# EAGLE board SparkFun_Thing_Plus_ESP32_WROOM_C-Panel (EAGLE 9.6.2), part 1 of 6
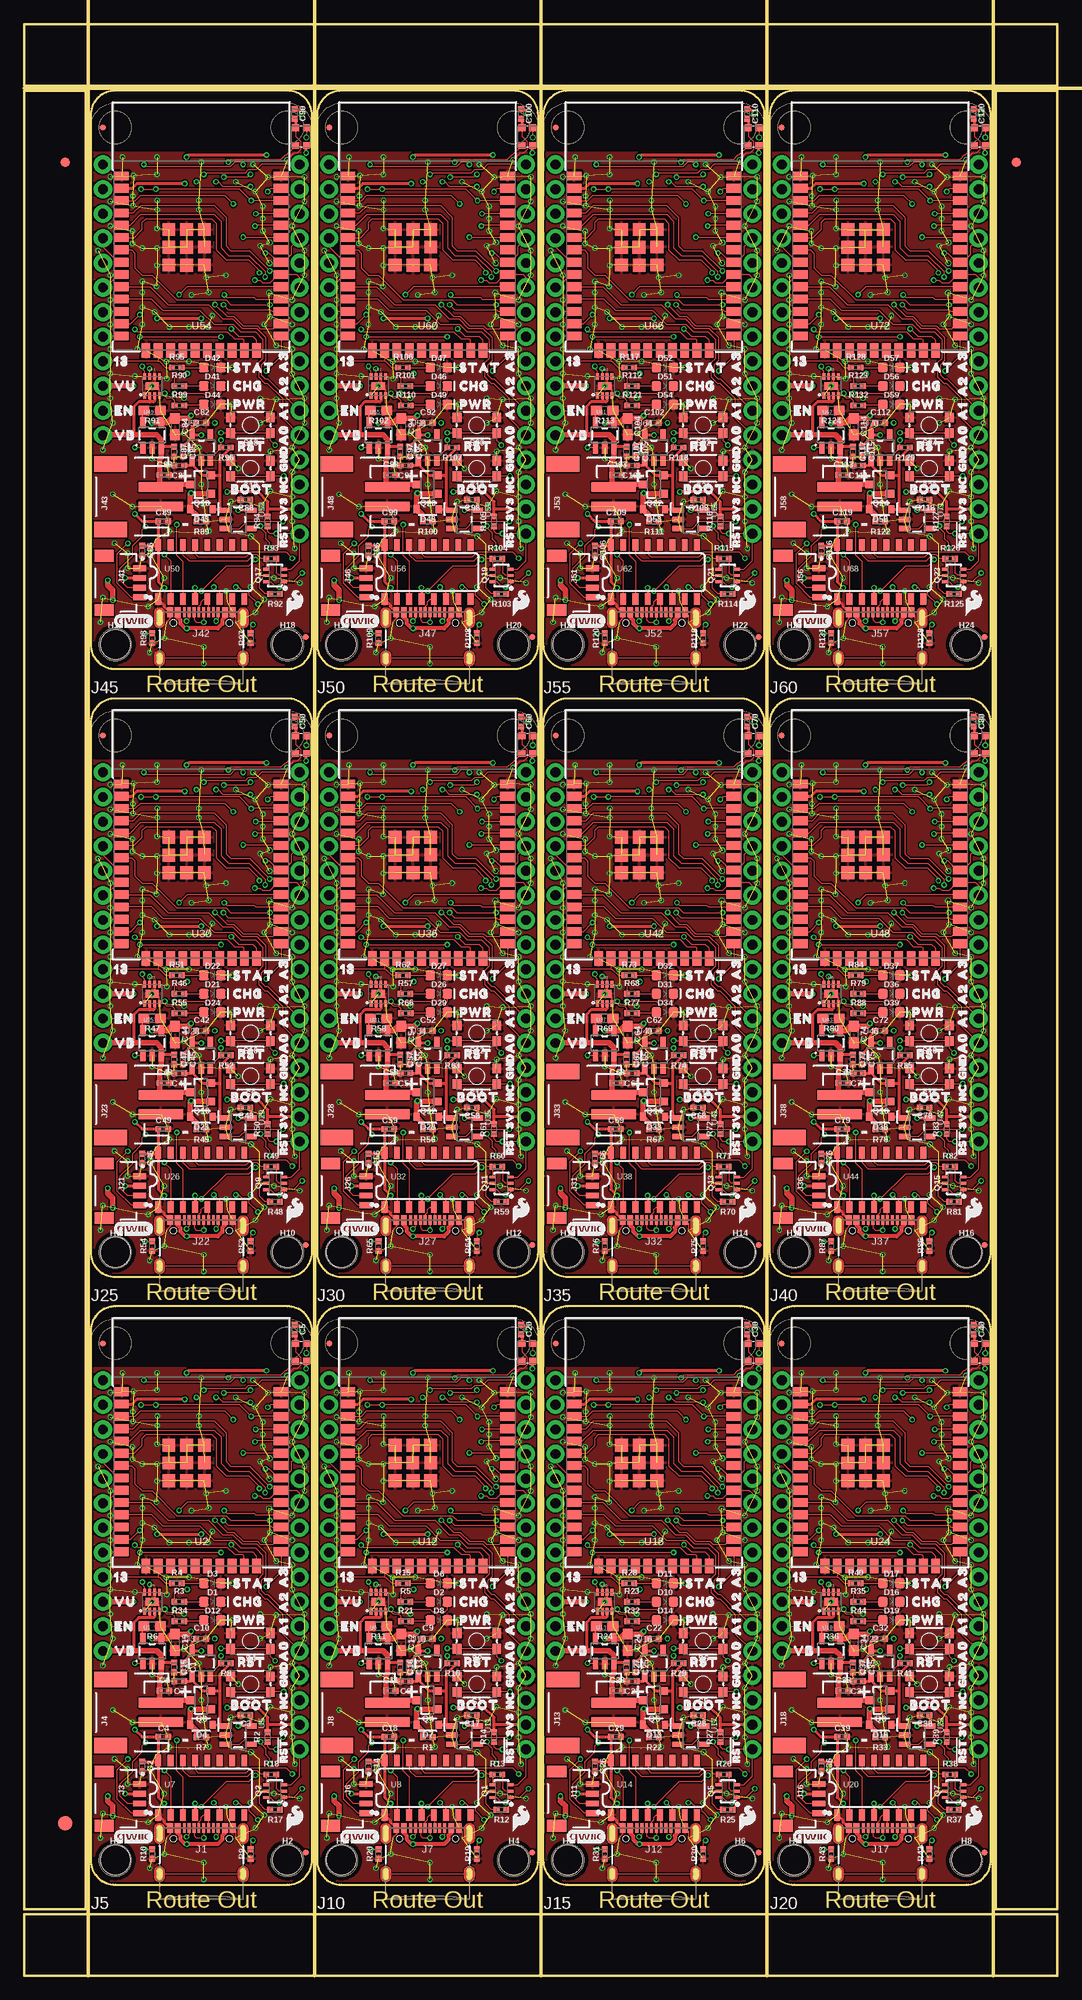
[diagram p0: board, top side]
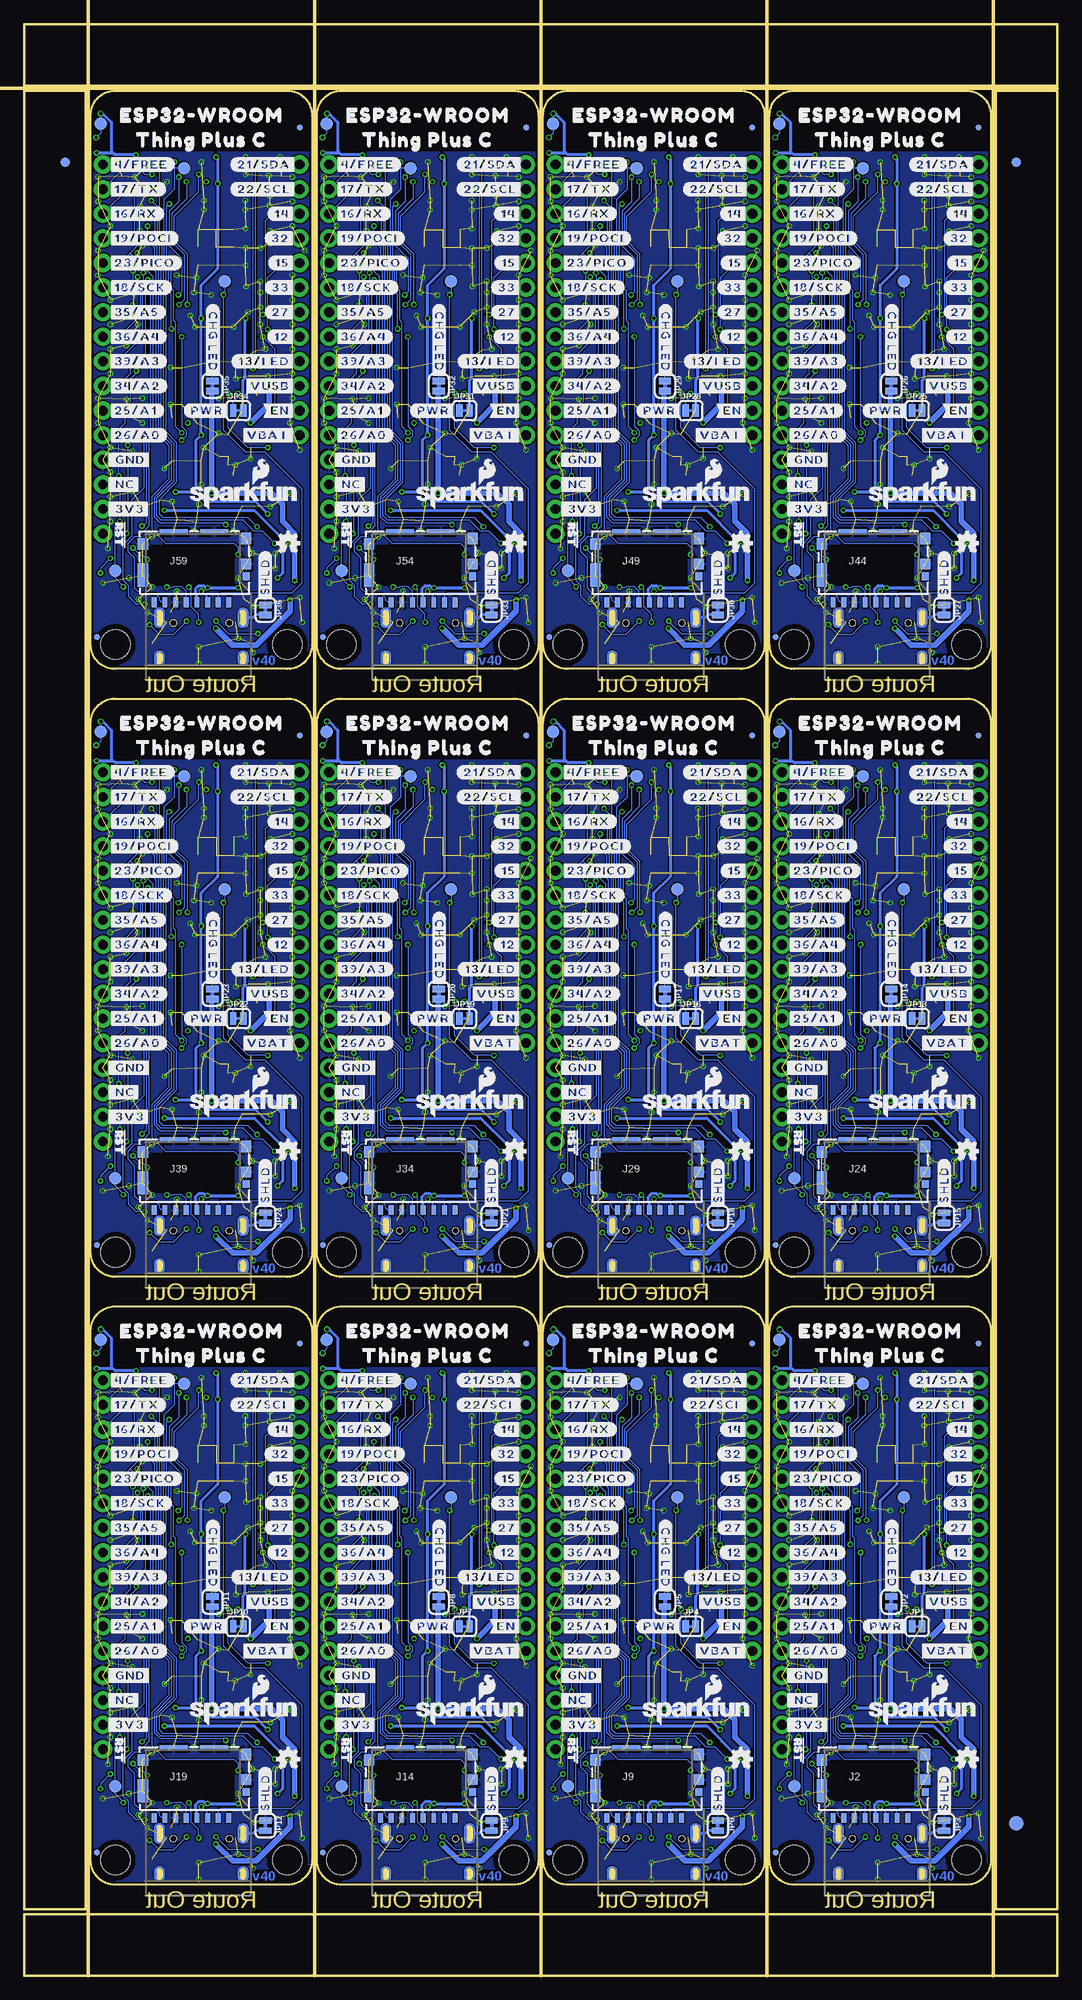
[diagram p1: board, bottom side, seen from below]

Size 106.68 x 201.42 mm. Coordinates in mm from the lower left corner, seen from the top.
Outline: 29.72,11.94 29.72,66.55 arc90 27.18,69.09 9.4,69.09 arc90 6.86,66.55 6.86,11.94 arc90 9.4,9.4 27.18,9.4 arc90 29.72,11.94
Outline: 53.09,11.94 53.09,66.55 arc90 50.55,69.09 32.77,69.09 arc90 30.23,66.55 30.23,11.94 arc90 32.77,9.4 50.55,9.4 arc90 53.09,11.94
Outline: 76.45,11.94 76.45,66.55 arc90 73.91,69.09 56.13,69.09 arc90 53.59,66.55 53.59,11.94 arc90 56.13,9.4 73.91,9.4 arc90 76.45,11.94
Outline: 99.82,11.94 99.82,66.55 arc90 97.28,69.09 79.5,69.09 arc90 76.96,66.55 76.96,11.94 arc90 79.5,9.4 97.28,9.4 arc90 99.82,11.94
Outline: 29.72,74.68 29.72,129.29 arc90 27.18,131.83 9.4,131.83 arc90 6.86,129.29 6.86,74.68 arc90 9.4,72.14 27.18,72.14 arc90 29.72,74.68
Outline: 53.09,74.68 53.09,129.29 arc90 50.55,131.83 32.77,131.83 arc90 30.23,129.29 30.23,74.68 arc90 32.77,72.14 50.55,72.14 arc90 53.09,74.68
Outline: 76.45,74.68 76.45,129.29 arc90 73.91,131.83 56.13,131.83 arc90 53.59,129.29 53.59,74.68 arc90 56.13,72.14 73.91,72.14 arc90 76.45,74.68
Outline: 99.82,74.68 99.82,129.29 arc90 97.28,131.83 79.5,131.83 arc90 76.96,129.29 76.96,74.68 arc90 79.5,72.14 97.28,72.14 arc90 99.82,74.68
Outline: 29.72,137.41 29.72,192.02 arc90 27.18,194.56 9.4,194.56 arc90 6.86,192.02 6.86,137.41 arc90 9.4,134.87 27.18,134.87 arc90 29.72,137.41
Outline: 53.09,137.41 53.09,192.02 arc90 50.55,194.56 32.77,194.56 arc90 30.23,192.02 30.23,137.41 arc90 32.77,134.87 50.55,134.87 arc90 53.09,137.41
Outline: 76.45,137.41 76.45,192.02 arc90 73.91,194.56 56.13,194.56 arc90 53.59,192.02 53.59,137.41 arc90 56.13,134.87 73.91,134.87 arc90 76.45,137.41
Outline: 99.82,137.41 99.82,192.02 arc90 97.28,194.56 79.5,194.56 arc90 76.96,192.02 76.96,137.41 arc90 79.5,134.87 97.28,134.87 arc90 99.82,137.41
Outline: 0,6.35 106.68,6.35 106.68,0 0,0 0,6.35
Outline: 100.33,194.56 106.68,194.56 106.68,6.86 100.33,6.86 100.33,194.56
Outline: 0,201.42 106.68,201.42 106.68,195.07 0,195.07 0,201.42
Outline: 0,194.56 6.35,194.56 6.35,6.86 0,6.86 0,194.56
Copper layers (1*16): Top 0.035mm / dielectric 1.5mm / Bottom 0.035mm
Design rules "SparkFun_Thing_Plus_ESP32_WROOM_C": minimum track width 5mil, minimum drill 0.3mm, track to track 5mil, track to pad 5mil, pad to pad 5mil, via to via 5mil, smd to smd 5mil, copper to edge 7mil, drill to drill 7mil, minimum pad ring 5mil, minimum via ring 5mil, stop-mask expansion 4mil, vias tented up to drill 25mil, thermal gap 10mil
Net classes: 0 default: width 0.127 mm, drill 0.305 mm; 1 power: width 0.305 mm, drill 0.305 mm
tRestrict: area 13.1,35.9 to 13.3,36.4; area 14.6,33.3 to 14.8,33.8; area 36.5,35.9 to 36.7,36.4; area 38,33.3 to 38.2,33.8; area 59.8,35.9 to 60,36.4; area 61.4,33.3 to 61.5,33.8; area 83.2,35.9 to 83.4,36.4; area 84.7,33.3 to 84.9,33.8; area 13.1,98.6 to 13.3,99.1; area 14.6,96.1 to 14.8,96.6; area 36.5,98.6 to 36.7,99.1; area 38,96.1 to 38.2,96.6; area 59.8,98.6 to 60,99.1; area 61.4,96.1 to 61.5,96.6; area 83.2,98.6 to 83.4,99.1; area 84.7,96.1 to 84.9,96.6; area 13.1,161.3 to 13.3,161.8; area 14.6,158.8 to 14.8,159.3; area 36.5,161.3 to 36.7,161.8; area 38,158.8 to 38.2,159.3; area 59.8,161.3 to 60,161.8; area 61.4,158.8 to 61.5,159.3; area 83.2,161.3 to 83.4,161.8; area 84.7,158.8 to 84.9,159.3
Milling: 6 lines

## Footprints (pad centres in the part's own frame; a part is rotated, then mirrored left to right if it is on the bottom)
0402-TIGHT = smd 0.6 x 0.6: 1 -0.5,0; 2 0.5,0
0603 = smd 1.1 x 1: 1 -0.85,0; 2 0.85,0
LED-0603 = smd 1 x 1: A -0.877,0; C 0.877,0
SOD-323 = smd 0.63 x 0.83: A 1.15,0; C -1.15,0
WS2812-2020 = smd 0.7 x 0.7: DI -0.915,0.55; DO 0.915,-0.55; GND 0.915,0.55; VCC -0.915,-0.55
FIDUCIAL-1X2 = smd 1 x 1: 1 0,0
FIDUCIAL-1.5X3 = smd 1.5 x 1.5: 1 0,0
FIDUCIAL-MICRO = smd 0.635 x 0.635: 1 0,0
STAND-OFF-TIGHT = hole 3.048: 0,0
USB-C-16P-2LAYER-PADS = smd 0.3 x 1: A5 -1.25,-0.34; A6 -0.25,-0.34; A7 0.25,-0.34; A8 1.25,-0.34; B5 1.75,-0.34; B6 0.75,-0.34; B7 -0.75,-0.34; B8 -1.75,-0.34 | smd 0.6 x 1: GND -3.225,-0.34; GND2 3.225,-0.34; VBUS1 -2.45,-0.34; VBUS2 2.45,-0.34 | drill 0.4 pad 0.6 long: SHLD1 -4.318,-0.915; SHLD2 4.318,-0.915; SHLD3 -4.318,-5.095; SHLD4 4.318,-5.095 | hole 0.65: -2.89,-1.445; 2.89,-1.445
MICROSD_TINY = smd 0.5 x 1: 1 3.55,-3.85; 2 2.45,-3.85; 3 1.35,-3.85; 4 0.25,-3.85; 5 -0.85,-3.85; 6 -1.95,-3.85; 7 -3.05,-3.85; 8 -4.15,-3.85 | smd 0.72 x 0.78: 9 5.35,-1.17 | smd 1.05 x 1.08: GND1 5.35,0.1 | smd 1.05 x 1.2: GND2 5.35,2.71; GND3 -5.325,2.14 | smd 1.05 x 2.39: GND4 -5.325,-1.045 | smd 2.91 x 0.55: GND5 -2.145,3.385; GND6 2.045,3.385
JST04_1MM_RA = smd 0.6 x 1.35: 1 -1.5,0; 2 -0.5,0; 3 0.5,0; 4 1.5,0 | smd 1.2 x 2: NC1 2.8,-3.675; NC2 -2.8,-3.675
JST-2-SMD = smd 1 x 4.6: 1 -1,-3.7; 2 1,-3.7 | smd 1.6 x 3.4: NC1 -3.4,1.5; NC2 3.4,1.5
THING_PLUS = drill 1.016 pad 1.88: 1 1.27,52.07; 2 1.27,49.53; 3 1.27,46.99; 4 1.27,44.45; 5 1.27,41.91; 6 1.27,39.37; 7 1.27,36.83; 8 1.27,34.29; 9 1.27,31.75; 10 1.27,29.21; 11 1.27,26.67; 12 1.27,24.13; 13 21.59,52.07; 14 21.59,49.53; 15 21.59,46.99; 16 21.59,44.45; 17 21.59,41.91; 18 21.59,39.37; 19 21.59,36.83; 20 21.59,34.29; 21 21.59,31.75; 22 21.59,29.21; 23 21.59,26.67; 24 21.59,24.13; 25 21.59,21.59; 26 21.59,19.05; 27 21.59,16.51; 28 21.59,13.97
SMT-JUMPER_2_NC_TRACE_SILK = smd 0.66 x 1.27: 1 -0.521,0; 2 0.521,0
SC70-6 = smd 0.3 x 0.66: 1 -0.65,-0.92; 2 0,-0.92; 3 0.65,-0.92; 4 0.65,0.92; 5 0,0.92; 6 -0.65,0.92
SOT23-3 = smd 0.8 x 0.9: 1 -0.95,-1; 2 0.95,-1; 3 0,1.1
TACTILE_SWITCH_SMD_4.6X2.8MM = smd 0.9 x 1: 1 -2.05,-0.8; 2 2.05,-0.8; 3 2.05,0.8; 4 -2.05,0.8
PAD.03X.05 = smd 1.27 x 1.27: 1 0,0
SOT23-5 = smd 0.55 x 1.2: 1 -0.95,-1.3; 2 0,-1.3; 3 0.95,-1.3; 4 0.95,1.3; 5 -0.95,1.3
ESP-WROOM-32D-NARROW = smd 0.9 x 1.5: 1 6.43,8.238; 2 5.16,8.238; 3 3.89,8.238; 4 2.62,8.238; 5 1.35,8.238; 6 0.08,8.238; 7 -1.19,8.238; 8 -2.46,8.238; 9 -3.73,8.238; 10 -5,8.238; 11 -6.27,8.238; 12 -7.54,8.238; 13 -8.81,8.238; 14 -10.08,8.238; 25 -10.08,-8.238; 26 -8.81,-8.238; 27 -7.54,-8.238; 28 -6.27,-8.238; 29 -5,-8.238; 30 -3.73,-8.238; 31 -2.46,-8.238; 32 -1.19,-8.238; 33 0.08,-8.238; 34 1.35,-8.238; 35 2.62,-8.238; 36 3.89,-8.238; 37 5.16,-8.238; 38 6.43,-8.238 | smd 1.5 x 0.9: 15 -11.57,5.715; 16 -11.57,4.445; 17 -11.57,3.175; 18 -11.57,1.905; 19 -11.57,0.635; 20 -11.57,-0.635; 21 -11.57,-1.905; 22 -11.57,-3.175; 23 -11.57,-4.445; 24 -11.57,-5.715 | smd 1.33 x 1.33: GND1 -0.912,1.531; GNDT1 -2.751,3.346; GNDT2 -2.761,1.516; GNDT3 -2.751,-0.314; GNDT4 -0.891,-0.324; GNDT5 0.909,-0.314; GNDT6 0.909,1.516; GNDT7 0.909,3.346; GNDT8 -0.921,3.346
DFN-8 = smd 0.3 x 0.7: 1 -0.75,-0.99; 2 -0.25,-0.99; 3 0.25,-0.99; 4 0.75,-0.99; 5 0.75,0.99; 6 0.25,0.99; 7 -0.25,0.99; 8 -0.75,0.99 | smd 1.38 x 0.8: 9 0,0
SO016 = smd 0.6 x 1.2: 1 -4.445,-2.8; 2 -3.175,-2.8; 3 -1.905,-2.8; 4 -0.635,-2.8; 5 0.635,-2.8; 6 1.905,-2.8; 7 3.175,-2.8; 8 4.445,-2.8; 9 4.445,2.8; 10 3.175,2.8; 11 1.905,2.8; 12 0.635,2.8; 13 -0.635,2.8; 14 -1.905,2.8; 15 -3.175,2.8; 16 -4.445,2.8

## Placement (x,y rotation side)
C1  10uF  [0402-TIGHT]  16.38,31.83 270 top
C2  0.1uF  [0402-TIGHT]  12.19,21.62 270 top
C3  1.0uF  [0402-TIGHT]  22.86,26.87 180 top
C4  0.1uF  [0402-TIGHT]  14.35,24.66 0 top
C5  10uF  [0402-TIGHT]  27.91,66.7 270 top
C6  4.7uF  [0402-TIGHT]  14.48,29.41 0 top
C7  1.0uF  [0402-TIGHT]  16,30.4 180 top
C8  1.0uF  [0402-TIGHT]  39.37,30.4 180 top
C9  1.0uF  [0402-TIGHT]  41.66,34.8 0 top
C10  1.0uF  [0402-TIGHT]  18.29,34.8 0 top
C11  4.7uF  [0402-TIGHT]  37.85,29.41 0 top
C12  4.7uF  [0603]  38.94,34.42 270 top
C13  10uF  [0402-TIGHT]  39.75,31.83 270 top
C14  0.1uF  [0402-TIGHT]  35.56,21.62 270 top
C15  0.1uF  [0402-TIGHT]  15.47,31.83 270 top
C16  0.1uF  [0402-TIGHT]  38.84,31.83 270 top
C17  1.0uF  [0402-TIGHT]  46.23,26.87 180 top
C18  0.1uF  [0402-TIGHT]  37.72,24.66 0 top
C19  4.7uF  [0603]  15.57,34.42 270 top
C20  10uF  [0402-TIGHT]  51.28,66.7 270 top
C21  1.0uF  [0402-TIGHT]  62.74,30.4 180 top
C22  1.0uF  [0402-TIGHT]  65.02,34.8 0 top
C23  4.7uF  [0402-TIGHT]  61.21,29.41 0 top
C24  4.7uF  [0603]  62.31,34.42 270 top
C25  10uF  [0402-TIGHT]  63.12,31.83 270 top
C26  0.1uF  [0402-TIGHT]  58.93,21.62 270 top
C27  0.1uF  [0402-TIGHT]  62.2,31.83 270 top
C28  1.0uF  [0402-TIGHT]  69.6,26.87 180 top
C29  0.1uF  [0402-TIGHT]  61.09,24.66 0 top
C30  10uF  [0402-TIGHT]  74.65,66.7 270 top
C31  1.0uF  [0402-TIGHT]  86.11,30.4 180 top
C32  1.0uF  [0402-TIGHT]  88.39,34.8 0 top
C33  4.7uF  [0402-TIGHT]  84.58,29.41 0 top
C34  4.7uF  [0603]  85.67,34.42 270 top
C35  10uF  [0402-TIGHT]  86.49,31.83 270 top
C36  0.1uF  [0402-TIGHT]  82.3,21.62 270 top
C37  0.1uF  [0402-TIGHT]  85.57,31.83 270 top
C38  1.0uF  [0402-TIGHT]  92.96,26.87 180 top
C39  0.1uF  [0402-TIGHT]  84.45,24.66 0 top
C40  10uF  [0402-TIGHT]  98.02,66.7 270 top
C41  1.0uF  [0402-TIGHT]  16,93.14 180 top
C42  1.0uF  [0402-TIGHT]  18.29,97.54 0 top
C43  4.7uF  [0402-TIGHT]  14.48,92.15 0 top
C44  4.7uF  [0603]  15.57,97.16 270 top
C45  10uF  [0402-TIGHT]  16.38,94.56 270 top
C46  0.1uF  [0402-TIGHT]  12.19,84.35 270 top
C47  0.1uF  [0402-TIGHT]  15.47,94.56 270 top
C48  1.0uF  [0402-TIGHT]  22.86,89.61 180 top
C49  0.1uF  [0402-TIGHT]  14.35,87.4 0 top
C50  10uF  [0402-TIGHT]  27.91,129.44 270 top
C51  1.0uF  [0402-TIGHT]  39.37,93.14 180 top
C52  1.0uF  [0402-TIGHT]  41.66,97.54 0 top
C53  4.7uF  [0402-TIGHT]  37.85,92.15 0 top
C54  4.7uF  [0603]  38.94,97.16 270 top
C55  10uF  [0402-TIGHT]  39.75,94.56 270 top
C56  0.1uF  [0402-TIGHT]  35.56,84.35 270 top
C57  0.1uF  [0402-TIGHT]  38.84,94.56 270 top
C58  1.0uF  [0402-TIGHT]  46.23,89.61 180 top
C59  0.1uF  [0402-TIGHT]  37.72,87.4 0 top
C60  10uF  [0402-TIGHT]  51.28,129.44 270 top
C61  1.0uF  [0402-TIGHT]  62.74,93.14 180 top
C62  1.0uF  [0402-TIGHT]  65.02,97.54 0 top
C63  4.7uF  [0402-TIGHT]  61.21,92.15 0 top
C64  4.7uF  [0603]  62.31,97.16 270 top
C65  10uF  [0402-TIGHT]  63.12,94.56 270 top
C66  0.1uF  [0402-TIGHT]  58.93,84.35 270 top
C67  0.1uF  [0402-TIGHT]  62.2,94.56 270 top
C68  1.0uF  [0402-TIGHT]  69.6,89.61 180 top
C69  0.1uF  [0402-TIGHT]  61.09,87.4 0 top
C70  10uF  [0402-TIGHT]  74.65,129.44 270 top
C71  1.0uF  [0402-TIGHT]  86.11,93.14 180 top
C72  1.0uF  [0402-TIGHT]  88.39,97.54 0 top
C73  4.7uF  [0402-TIGHT]  84.58,92.15 0 top
C74  4.7uF  [0603]  85.67,97.16 270 top
C75  10uF  [0402-TIGHT]  86.49,94.56 270 top
C76  0.1uF  [0402-TIGHT]  82.3,84.35 270 top
C77  0.1uF  [0402-TIGHT]  85.57,94.56 270 top
C78  1.0uF  [0402-TIGHT]  92.96,89.61 180 top
C79  0.1uF  [0402-TIGHT]  84.45,87.4 0 top
C80  10uF  [0402-TIGHT]  98.02,129.44 270 top
C81  1.0uF  [0402-TIGHT]  16,155.88 180 top
C82  1.0uF  [0402-TIGHT]  18.29,160.27 0 top
C83  4.7uF  [0402-TIGHT]  14.48,154.89 0 top
C84  4.7uF  [0603]  15.57,159.89 270 top
C85  10uF  [0402-TIGHT]  16.38,157.3 270 top
C86  0.1uF  [0402-TIGHT]  12.19,147.09 270 top
C87  0.1uF  [0402-TIGHT]  15.47,157.3 270 top
C88  1.0uF  [0402-TIGHT]  22.86,152.35 180 top
C89  0.1uF  [0402-TIGHT]  14.35,150.14 0 top
C90  10uF  [0402-TIGHT]  27.91,192.18 270 top
C91  1.0uF  [0402-TIGHT]  39.37,155.88 180 top
C92  1.0uF  [0402-TIGHT]  41.66,160.27 0 top
C93  4.7uF  [0402-TIGHT]  37.85,154.89 0 top
C94  4.7uF  [0603]  38.94,159.89 270 top
C95  10uF  [0402-TIGHT]  39.75,157.3 270 top
C96  0.1uF  [0402-TIGHT]  35.56,147.09 270 top
C97  0.1uF  [0402-TIGHT]  38.84,157.3 270 top
C98  1.0uF  [0402-TIGHT]  46.23,152.35 180 top
C99  0.1uF  [0402-TIGHT]  37.72,150.14 0 top
C100  10uF  [0402-TIGHT]  51.28,192.18 270 top
C101  1.0uF  [0402-TIGHT]  62.74,155.88 180 top
C102  1.0uF  [0402-TIGHT]  65.02,160.27 0 top
C103  4.7uF  [0402-TIGHT]  61.21,154.89 0 top
C104  4.7uF  [0603]  62.31,159.89 270 top
C105  10uF  [0402-TIGHT]  63.12,157.3 270 top
C106  0.1uF  [0402-TIGHT]  58.93,147.09 270 top
C107  0.1uF  [0402-TIGHT]  62.2,157.3 270 top
C108  1.0uF  [0402-TIGHT]  69.6,152.35 180 top
C109  0.1uF  [0402-TIGHT]  61.09,150.14 0 top
C110  10uF  [0402-TIGHT]  74.65,192.18 270 top
C111  1.0uF  [0402-TIGHT]  86.11,155.88 180 top
C112  1.0uF  [0402-TIGHT]  88.39,160.27 0 top
C113  4.7uF  [0402-TIGHT]  84.58,154.89 0 top
C114  4.7uF  [0603]  85.67,159.89 270 top
C115  10uF  [0402-TIGHT]  86.49,157.3 270 top
C116  0.1uF  [0402-TIGHT]  82.3,147.09 270 top
C117  0.1uF  [0402-TIGHT]  85.57,157.3 270 top
C118  1.0uF  [0402-TIGHT]  92.96,152.35 180 top
C119  0.1uF  [0402-TIGHT]  84.45,150.14 0 top
C120  10uF  [0402-TIGHT]  98.02,192.18 270 top
D1  Yellow  [LED-0603]  19.43,38.61 0 top
D2  Yellow  [LED-0603]  42.8,38.61 0 top
D3  BLUE  [LED-0603]  19.43,40.51 0 top
D4  3A/10V/280mV  [SOD-323]  18.29,25.91 180 top
D5  WS2812  [WS2812-2020]  28.57,64.34 90 top
D6  BLUE  [LED-0603]  42.8,40.51 0 top
D7  3A/10V/280mV  [SOD-323]  41.66,25.91 180 top
D8  RED  [LED-0603]  42.8,36.7 0 top
D9  WS2812  [WS2812-2020]  51.94,64.34 90 top
D10  Yellow  [LED-0603]  66.17,38.61 0 top
D11  BLUE  [LED-0603]  66.17,40.51 0 top
D12  RED  [LED-0603]  19.43,36.7 0 top
D13  3A/10V/280mV  [SOD-323]  65.02,25.91 180 top
D14  RED  [LED-0603]  66.17,36.7 0 top
D15  WS2812  [WS2812-2020]  75.31,64.34 90 top
D16  Yellow  [LED-0603]  89.54,38.61 0 top
D17  BLUE  [LED-0603]  89.54,40.51 0 top
D18  3A/10V/280mV  [SOD-323]  88.39,25.91 180 top
D19  RED  [LED-0603]  89.54,36.7 0 top
D20  WS2812  [WS2812-2020]  98.68,64.34 90 top
D21  Yellow  [LED-0603]  19.43,101.35 0 top
D22  BLUE  [LED-0603]  19.43,103.25 0 top
D23  3A/10V/280mV  [SOD-323]  18.29,88.65 180 top
D24  RED  [LED-0603]  19.43,99.44 0 top
D25  WS2812  [WS2812-2020]  28.57,127.08 90 top
D26  Yellow  [LED-0603]  42.8,101.35 0 top
D27  BLUE  [LED-0603]  42.8,103.25 0 top
D28  3A/10V/280mV  [SOD-323]  41.66,88.65 180 top
D29  RED  [LED-0603]  42.8,99.44 0 top
D30  WS2812  [WS2812-2020]  51.94,127.08 90 top
D31  Yellow  [LED-0603]  66.17,101.35 0 top
D32  BLUE  [LED-0603]  66.17,103.25 0 top
D33  3A/10V/280mV  [SOD-323]  65.02,88.65 180 top
D34  RED  [LED-0603]  66.17,99.44 0 top
D35  WS2812  [WS2812-2020]  75.31,127.08 90 top
D36  Yellow  [LED-0603]  89.54,101.35 0 top
D37  BLUE  [LED-0603]  89.54,103.25 0 top
D38  3A/10V/280mV  [SOD-323]  88.39,88.65 180 top
D39  RED  [LED-0603]  89.54,99.44 0 top
D40  WS2812  [WS2812-2020]  98.68,127.08 90 top
D41  Yellow  [LED-0603]  19.43,164.08 0 top
D42  BLUE  [LED-0603]  19.43,165.99 0 top
D43  3A/10V/280mV  [SOD-323]  18.29,151.38 180 top
D44  RED  [LED-0603]  19.43,162.18 0 top
D45  WS2812  [WS2812-2020]  28.57,189.81 90 top
D46  Yellow  [LED-0603]  42.8,164.08 0 top
D47  BLUE  [LED-0603]  42.8,165.99 0 top
D48  3A/10V/280mV  [SOD-323]  41.66,151.38 180 top
D49  RED  [LED-0603]  42.8,162.18 0 top
D50  WS2812  [WS2812-2020]  51.94,189.81 90 top
D51  Yellow  [LED-0603]  66.17,164.08 0 top
D52  BLUE  [LED-0603]  66.17,165.99 0 top
D53  3A/10V/280mV  [SOD-323]  65.02,151.38 180 top
D54  RED  [LED-0603]  66.17,162.18 0 top
D55  WS2812  [WS2812-2020]  75.31,189.81 90 top
D56  Yellow  [LED-0603]  89.54,164.08 0 top
D57  BLUE  [LED-0603]  89.54,165.99 0 top
D58  3A/10V/280mV  [SOD-323]  88.39,151.38 180 top
D59  RED  [LED-0603]  89.54,162.18 0 top
D60  WS2812  [WS2812-2020]  98.68,189.81 90 top
E$1  [FIDUCIAL-1X2]  4.23,187.2 0 top
E$2  [FIDUCIAL-1X2]  4.23,187.2 0 bottom
E$3  [FIDUCIAL-1X2]  102.45,187.2 0 top
E$4  [FIDUCIAL-1X2]  102.45,187.2 0 bottom
E$5  [FIDUCIAL-1.5X3]  4.23,15.75 0 top
E$6  [FIDUCIAL-1.5X3]  4.23,15.75 0 bottom
FD1  FIDUCIALUFIDUCIAL  [FIDUCIAL-MICRO]  8.13,65.28 0 top
FD2  FIDUCIALUFIDUCIAL  [FIDUCIAL-MICRO]  8.13,65.28 0 bottom
FD3  FIDUCIALUFIDUCIAL  [FIDUCIAL-MICRO]  29.08,12.7 0 top
FD4  FIDUCIALUFIDUCIAL  [FIDUCIAL-MICRO]  29.08,12.7 0 bottom
FD5  FIDUCIALUFIDUCIAL  [FIDUCIAL-MICRO]  31.5,65.28 0 top
FD6  FIDUCIALUFIDUCIAL  [FIDUCIAL-MICRO]  31.5,65.28 0 bottom
FD7  FIDUCIALUFIDUCIAL  [FIDUCIAL-MICRO]  52.45,12.7 0 top
FD8  FIDUCIALUFIDUCIAL  [FIDUCIAL-MICRO]  52.45,12.7 0 bottom
FD9  FIDUCIALUFIDUCIAL  [FIDUCIAL-MICRO]  54.86,65.28 0 top
FD10  FIDUCIALUFIDUCIAL  [FIDUCIAL-MICRO]  54.86,65.28 0 bottom
FD11  FIDUCIALUFIDUCIAL  [FIDUCIAL-MICRO]  75.82,12.7 0 top
FD12  FIDUCIALUFIDUCIAL  [FIDUCIAL-MICRO]  75.82,12.7 0 bottom
FD13  FIDUCIALUFIDUCIAL  [FIDUCIAL-MICRO]  78.23,65.28 0 top
FD14  FIDUCIALUFIDUCIAL  [FIDUCIAL-MICRO]  78.23,65.28 0 bottom
FD15  FIDUCIALUFIDUCIAL  [FIDUCIAL-MICRO]  99.19,12.7 0 top
FD16  FIDUCIALUFIDUCIAL  [FIDUCIAL-MICRO]  99.19,12.7 0 bottom
FD17  FIDUCIALUFIDUCIAL  [FIDUCIAL-MICRO]  8.13,128.02 0 top
FD18  FIDUCIALUFIDUCIAL  [FIDUCIAL-MICRO]  8.13,128.02 0 bottom
FD19  FIDUCIALUFIDUCIAL  [FIDUCIAL-MICRO]  29.08,75.44 0 top
FD20  FIDUCIALUFIDUCIAL  [FIDUCIAL-MICRO]  29.08,75.44 0 bottom
FD21  FIDUCIALUFIDUCIAL  [FIDUCIAL-MICRO]  31.5,128.02 0 top
FD22  FIDUCIALUFIDUCIAL  [FIDUCIAL-MICRO]  31.5,128.02 0 bottom
FD23  FIDUCIALUFIDUCIAL  [FIDUCIAL-MICRO]  52.45,75.44 0 top
FD24  FIDUCIALUFIDUCIAL  [FIDUCIAL-MICRO]  52.45,75.44 0 bottom
FD25  FIDUCIALUFIDUCIAL  [FIDUCIAL-MICRO]  54.86,128.02 0 top
FD26  FIDUCIALUFIDUCIAL  [FIDUCIAL-MICRO]  54.86,128.02 0 bottom
FD27  FIDUCIALUFIDUCIAL  [FIDUCIAL-MICRO]  75.82,75.44 0 top
FD28  FIDUCIALUFIDUCIAL  [FIDUCIAL-MICRO]  75.82,75.44 0 bottom
FD29  FIDUCIALUFIDUCIAL  [FIDUCIAL-MICRO]  78.23,128.02 0 top
FD30  FIDUCIALUFIDUCIAL  [FIDUCIAL-MICRO]  78.23,128.02 0 bottom
FD31  FIDUCIALUFIDUCIAL  [FIDUCIAL-MICRO]  99.19,75.44 0 top
FD32  FIDUCIALUFIDUCIAL  [FIDUCIAL-MICRO]  99.19,75.44 0 bottom
FD33  FIDUCIALUFIDUCIAL  [FIDUCIAL-MICRO]  8.13,190.75 0 top
FD34  FIDUCIALUFIDUCIAL  [FIDUCIAL-MICRO]  8.13,190.75 0 bottom
FD35  FIDUCIALUFIDUCIAL  [FIDUCIAL-MICRO]  29.08,138.18 0 top
FD36  FIDUCIALUFIDUCIAL  [FIDUCIAL-MICRO]  29.08,138.18 0 bottom
FD37  FIDUCIALUFIDUCIAL  [FIDUCIAL-MICRO]  31.5,190.75 0 top
FD38  FIDUCIALUFIDUCIAL  [FIDUCIAL-MICRO]  31.5,190.75 0 bottom
FD39  FIDUCIALUFIDUCIAL  [FIDUCIAL-MICRO]  52.45,138.18 0 top
FD40  FIDUCIALUFIDUCIAL  [FIDUCIAL-MICRO]  52.45,138.18 0 bottom
FD41  FIDUCIALUFIDUCIAL  [FIDUCIAL-MICRO]  54.86,190.75 0 top
FD42  FIDUCIALUFIDUCIAL  [FIDUCIAL-MICRO]  54.86,190.75 0 bottom
FD43  FIDUCIALUFIDUCIAL  [FIDUCIAL-MICRO]  75.82,138.18 0 top
FD44  FIDUCIALUFIDUCIAL  [FIDUCIAL-MICRO]  75.82,138.18 0 bottom
FD45  FIDUCIALUFIDUCIAL  [FIDUCIAL-MICRO]  78.23,190.75 0 top
FD46  FIDUCIALUFIDUCIAL  [FIDUCIAL-MICRO]  78.23,190.75 0 bottom
FD47  FIDUCIALUFIDUCIAL  [FIDUCIAL-MICRO]  99.19,138.18 0 top
FD48  FIDUCIALUFIDUCIAL  [FIDUCIAL-MICRO]  99.19,138.18 0 bottom
H1  STAND-OFFTIGHT  [STAND-OFF-TIGHT]  9.4,11.94 0 top
H2  STAND-OFFTIGHT  [STAND-OFF-TIGHT]  27.18,11.94 0 top
H3  STAND-OFFTIGHT  [STAND-OFF-TIGHT]  32.77,11.94 0 top
H4  STAND-OFFTIGHT  [STAND-OFF-TIGHT]  50.55,11.94 0 top
H5  STAND-OFFTIGHT  [STAND-OFF-TIGHT]  56.13,11.94 0 top
H6  STAND-OFFTIGHT  [STAND-OFF-TIGHT]  73.91,11.94 0 top
H7  STAND-OFFTIGHT  [STAND-OFF-TIGHT]  79.5,11.94 0 top
H8  STAND-OFFTIGHT  [STAND-OFF-TIGHT]  97.28,11.94 0 top
H9  STAND-OFFTIGHT  [STAND-OFF-TIGHT]  9.4,74.68 0 top
H10  STAND-OFFTIGHT  [STAND-OFF-TIGHT]  27.18,74.68 0 top
H11  STAND-OFFTIGHT  [STAND-OFF-TIGHT]  32.77,74.68 0 top
H12  STAND-OFFTIGHT  [STAND-OFF-TIGHT]  50.55,74.68 0 top
H13  STAND-OFFTIGHT  [STAND-OFF-TIGHT]  56.13,74.68 0 top
H14  STAND-OFFTIGHT  [STAND-OFF-TIGHT]  73.91,74.68 0 top
H15  STAND-OFFTIGHT  [STAND-OFF-TIGHT]  79.5,74.68 0 top
H16  STAND-OFFTIGHT  [STAND-OFF-TIGHT]  97.28,74.68 0 top
H17  STAND-OFFTIGHT  [STAND-OFF-TIGHT]  9.4,137.41 0 top
H18  STAND-OFFTIGHT  [STAND-OFF-TIGHT]  27.18,137.41 0 top
H19  STAND-OFFTIGHT  [STAND-OFF-TIGHT]  32.77,137.41 0 top
H20  STAND-OFFTIGHT  [STAND-OFF-TIGHT]  50.55,137.41 0 top
H21  STAND-OFFTIGHT  [STAND-OFF-TIGHT]  56.13,137.41 0 top
H22  STAND-OFFTIGHT  [STAND-OFF-TIGHT]  73.91,137.41 0 top
H23  STAND-OFFTIGHT  [STAND-OFF-TIGHT]  79.5,137.41 0 top
H24  STAND-OFFTIGHT  [STAND-OFF-TIGHT]  97.28,137.41 0 top
J1  [USB-C-16P-2LAYER-PADS]  18.29,15.6 0 top
J2  MICRO-SDFRICTION  [MICROSD_TINY]  19,20.14 0 bottom
J3  QWIIC_RA  [JST04_1MM_RA]  11.94,18.29 270 top
J4  [JST-2-SMD]  10.41,27.18 90 top
J5  THING_PLUS_LOGICAL  [THING_PLUS]  6.86,9.4 0 top
J6  QWIIC_RA  [JST04_1MM_RA]  35.31,18.29 270 top
J7  [USB-C-16P-2LAYER-PADS]  41.66,15.6 0 top
J8  [JST-2-SMD]  33.78,27.18 90 top
J9  MICRO-SDFRICTION  [MICROSD_TINY]  42.37,20.14 0 bottom
J10  THING_PLUS_LOGICAL  [THING_PLUS]  30.23,9.4 0 top
J11  QWIIC_RA  [JST04_1MM_RA]  58.67,18.29 270 top
J12  [USB-C-16P-2LAYER-PADS]  65.02,15.6 0 top
J13  [JST-2-SMD]  57.15,27.18 90 top
J14  MICRO-SDFRICTION  [MICROSD_TINY]  65.74,20.14 0 bottom
J15  THING_PLUS_LOGICAL  [THING_PLUS]  53.59,9.4 0 top
J16  QWIIC_RA  [JST04_1MM_RA]  82.04,18.29 270 top
J17  [USB-C-16P-2LAYER-PADS]  88.39,15.6 0 top
J18  [JST-2-SMD]  80.52,27.18 90 top
J19  MICRO-SDFRICTION  [MICROSD_TINY]  89.1,20.14 0 bottom
J20  THING_PLUS_LOGICAL  [THING_PLUS]  76.96,9.4 0 top
J21  QWIIC_RA  [JST04_1MM_RA]  11.94,81.03 270 top
J22  [USB-C-16P-2LAYER-PADS]  18.29,78.33 0 top
J23  [JST-2-SMD]  10.41,89.92 90 top
J24  MICRO-SDFRICTION  [MICROSD_TINY]  19,82.88 0 bottom
J25  THING_PLUS_LOGICAL  [THING_PLUS]  6.86,72.14 0 top
J26  QWIIC_RA  [JST04_1MM_RA]  35.31,81.03 270 top
J27  [USB-C-16P-2LAYER-PADS]  41.66,78.33 0 top
J28  [JST-2-SMD]  33.78,89.92 90 top
J29  MICRO-SDFRICTION  [MICROSD_TINY]  42.37,82.88 0 bottom
J30  THING_PLUS_LOGICAL  [THING_PLUS]  30.23,72.14 0 top
J31  QWIIC_RA  [JST04_1MM_RA]  58.67,81.03 270 top
J32  [USB-C-16P-2LAYER-PADS]  65.02,78.33 0 top
J33  [JST-2-SMD]  57.15,89.92 90 top
J34  MICRO-SDFRICTION  [MICROSD_TINY]  65.74,82.88 0 bottom
J35  THING_PLUS_LOGICAL  [THING_PLUS]  53.59,72.14 0 top
J36  QWIIC_RA  [JST04_1MM_RA]  82.04,81.03 270 top
J37  [USB-C-16P-2LAYER-PADS]  88.39,78.33 0 top
J38  [JST-2-SMD]  80.52,89.92 90 top
J39  MICRO-SDFRICTION  [MICROSD_TINY]  89.1,82.88 0 bottom
J40  THING_PLUS_LOGICAL  [THING_PLUS]  76.96,72.14 0 top
J41  QWIIC_RA  [JST04_1MM_RA]  11.94,143.76 270 top
J42  [USB-C-16P-2LAYER-PADS]  18.29,141.07 0 top
J43  [JST-2-SMD]  10.41,152.65 90 top
J44  MICRO-SDFRICTION  [MICROSD_TINY]  19,145.62 0 bottom
J45  THING_PLUS_LOGICAL  [THING_PLUS]  6.86,134.87 0 top
J46  QWIIC_RA  [JST04_1MM_RA]  35.31,143.76 270 top
J47  [USB-C-16P-2LAYER-PADS]  41.66,141.07 0 top
J48  [JST-2-SMD]  33.78,152.65 90 top
J49  MICRO-SDFRICTION  [MICROSD_TINY]  42.37,145.62 0 bottom
J50  THING_PLUS_LOGICAL  [THING_PLUS]  30.23,134.87 0 top
J51  QWIIC_RA  [JST04_1MM_RA]  58.67,143.76 270 top
J52  [USB-C-16P-2LAYER-PADS]  65.02,141.07 0 top
J53  [JST-2-SMD]  57.15,152.65 90 top
J54  MICRO-SDFRICTION  [MICROSD_TINY]  65.74,145.62 0 bottom
J55  THING_PLUS_LOGICAL  [THING_PLUS]  53.59,134.87 0 top
J56  QWIIC_RA  [JST04_1MM_RA]  82.04,143.76 270 top
J57  [USB-C-16P-2LAYER-PADS]  88.39,141.07 0 top
J58  [JST-2-SMD]  80.52,152.65 90 top
J59  MICRO-SDFRICTION  [MICROSD_TINY]  89.1,145.62 0 bottom
J60  THING_PLUS_LOGICAL  [THING_PLUS]  76.96,134.87 0 top
JP1  JUMPER-SMT_2_NC_TRACE_SILK  [SMT-JUMPER_2_NC_TRACE_SILK]  14.48,36.07 0 bottom
JP2  JUMPER-SMT_2_NC_TRACE_SILK  [SMT-JUMPER_2_NC_TRACE_SILK]  17.14,38.61 270 bottom
JP3  JUMPER-SMT_2_NC_TRACE_SILK  [SMT-JUMPER_2_NC_TRACE_SILK]  11.68,15.49 270 bottom
JP4  JUMPER-SMT_2_NC_TRACE_SILK  [SMT-JUMPER_2_NC_TRACE_SILK]  37.85,36.07 0 bottom
JP5  JUMPER-SMT_2_NC_TRACE_SILK  [SMT-JUMPER_2_NC_TRACE_SILK]  40.51,38.61 270 bottom
JP6  JUMPER-SMT_2_NC_TRACE_SILK  [SMT-JUMPER_2_NC_TRACE_SILK]  35.05,15.49 270 bottom
JP7  JUMPER-SMT_2_NC_TRACE_SILK  [SMT-JUMPER_2_NC_TRACE_SILK]  61.21,36.07 0 bottom
JP8  JUMPER-SMT_2_NC_TRACE_SILK  [SMT-JUMPER_2_NC_TRACE_SILK]  63.88,38.61 270 bottom
JP9  JUMPER-SMT_2_NC_TRACE_SILK  [SMT-JUMPER_2_NC_TRACE_SILK]  58.42,15.49 270 bottom
JP10  JUMPER-SMT_2_NC_TRACE_SILK  [SMT-JUMPER_2_NC_TRACE_SILK]  84.58,36.07 0 bottom
JP11  JUMPER-SMT_2_NC_TRACE_SILK  [SMT-JUMPER_2_NC_TRACE_SILK]  87.25,38.61 270 bottom
JP12  JUMPER-SMT_2_NC_TRACE_SILK  [SMT-JUMPER_2_NC_TRACE_SILK]  81.79,15.49 270 bottom
JP13  JUMPER-SMT_2_NC_TRACE_SILK  [SMT-JUMPER_2_NC_TRACE_SILK]  14.48,98.81 0 bottom
JP14  JUMPER-SMT_2_NC_TRACE_SILK  [SMT-JUMPER_2_NC_TRACE_SILK]  17.14,101.35 270 bottom
JP15  JUMPER-SMT_2_NC_TRACE_SILK  [SMT-JUMPER_2_NC_TRACE_SILK]  11.68,78.23 270 bottom
JP16  JUMPER-SMT_2_NC_TRACE_SILK  [SMT-JUMPER_2_NC_TRACE_SILK]  37.85,98.81 0 bottom
JP17  JUMPER-SMT_2_NC_TRACE_SILK  [SMT-JUMPER_2_NC_TRACE_SILK]  40.51,101.35 270 bottom
JP18  JUMPER-SMT_2_NC_TRACE_SILK  [SMT-JUMPER_2_NC_TRACE_SILK]  35.05,78.23 270 bottom
JP19  JUMPER-SMT_2_NC_TRACE_SILK  [SMT-JUMPER_2_NC_TRACE_SILK]  61.21,98.81 0 bottom
JP20  JUMPER-SMT_2_NC_TRACE_SILK  [SMT-JUMPER_2_NC_TRACE_SILK]  63.88,101.35 270 bottom
JP21  JUMPER-SMT_2_NC_TRACE_SILK  [SMT-JUMPER_2_NC_TRACE_SILK]  58.42,78.23 270 bottom
JP22  JUMPER-SMT_2_NC_TRACE_SILK  [SMT-JUMPER_2_NC_TRACE_SILK]  84.58,98.81 0 bottom
JP23  JUMPER-SMT_2_NC_TRACE_SILK  [SMT-JUMPER_2_NC_TRACE_SILK]  87.25,101.35 270 bottom
JP24  JUMPER-SMT_2_NC_TRACE_SILK  [SMT-JUMPER_2_NC_TRACE_SILK]  81.79,78.23 270 bottom
JP25  JUMPER-SMT_2_NC_TRACE_SILK  [SMT-JUMPER_2_NC_TRACE_SILK]  14.48,161.54 0 bottom
JP26  JUMPER-SMT_2_NC_TRACE_SILK  [SMT-JUMPER_2_NC_TRACE_SILK]  17.14,164.08 270 bottom
JP27  JUMPER-SMT_2_NC_TRACE_SILK  [SMT-JUMPER_2_NC_TRACE_SILK]  11.68,140.97 270 bottom
JP28  JUMPER-SMT_2_NC_TRACE_SILK  [SMT-JUMPER_2_NC_TRACE_SILK]  37.85,161.54 0 bottom
JP29  JUMPER-SMT_2_NC_TRACE_SILK  [SMT-JUMPER_2_NC_TRACE_SILK]  40.51,164.08 270 bottom
JP30  JUMPER-SMT_2_NC_TRACE_SILK  [SMT-JUMPER_2_NC_TRACE_SILK]  35.05,140.97 270 bottom
JP31  JUMPER-SMT_2_NC_TRACE_SILK  [SMT-JUMPER_2_NC_TRACE_SILK]  61.21,161.54 0 bottom
JP32  JUMPER-SMT_2_NC_TRACE_SILK  [SMT-JUMPER_2_NC_TRACE_SILK]  63.88,164.08 270 bottom
JP33  JUMPER-SMT_2_NC_TRACE_SILK  [SMT-JUMPER_2_NC_TRACE_SILK]  58.42,140.97 270 bottom
JP34  JUMPER-SMT_2_NC_TRACE_SILK  [SMT-JUMPER_2_NC_TRACE_SILK]  84.58,161.54 0 bottom
JP35  JUMPER-SMT_2_NC_TRACE_SILK  [SMT-JUMPER_2_NC_TRACE_SILK]  87.25,164.08 270 bottom
JP36  JUMPER-SMT_2_NC_TRACE_SILK  [SMT-JUMPER_2_NC_TRACE_SILK]  81.79,140.97 270 bottom
LOGO1  SFE_LOGO_NAME_FLAME.1_INCH  [SFE_LOGO_NAME_FLAME_.1]  13.87,27.36 0 bottom
LOGO2  OSHW-LOGOMINI  [OSHW-LOGO-MINI]  9.32,22.38 0 bottom
LOGO3  OSHW-LOGOMINI  [OSHW-LOGO-MINI]  32.69,22.38 0 bottom
LOGO4  QWIIC_LOGO_4MM  [QWIIC_4MM]  11.3,14.35 0 top
LOGO5  QWIIC_LOGO_4MM  [QWIIC_4MM]  34.67,14.35 0 top
LOGO6  SFE_LOGO_NAME_FLAME.1_INCH  [SFE_LOGO_NAME_FLAME_.1]  37.24,27.36 0 bottom
LOGO7  OSHW-LOGOMINI  [OSHW-LOGO-MINI]  56.06,22.38 0 bottom
LOGO8  QWIIC_LOGO_4MM  [QWIIC_4MM]  58.04,14.35 0 top
LOGO9  SFE_LOGO_NAME_FLAME.1_INCH  [SFE_LOGO_NAME_FLAME_.1]  60.6,27.36 0 bottom
LOGO10  OSHW-LOGOMINI  [OSHW-LOGO-MINI]  79.43,22.38 0 bottom
LOGO11  QWIIC_LOGO_4MM  [QWIIC_4MM]  81.41,14.35 0 top
LOGO12  SFE_LOGO_NAME_FLAME.1_INCH  [SFE_LOGO_NAME_FLAME_.1]  83.97,27.36 0 bottom
LOGO13  OSHW-LOGOMINI  [OSHW-LOGO-MINI]  9.32,85.12 0 bottom
LOGO14  QWIIC_LOGO_4MM  [QWIIC_4MM]  11.3,77.09 0 top
LOGO15  SFE_LOGO_NAME_FLAME.1_INCH  [SFE_LOGO_NAME_FLAME_.1]  13.87,90.09 0 bottom
LOGO16  OSHW-LOGOMINI  [OSHW-LOGO-MINI]  32.69,85.12 0 bottom
LOGO17  QWIIC_LOGO_4MM  [QWIIC_4MM]  34.67,77.09 0 top
LOGO18  SFE_LOGO_NAME_FLAME.1_INCH  [SFE_LOGO_NAME_FLAME_.1]  37.24,90.09 0 bottom
LOGO19  OSHW-LOGOMINI  [OSHW-LOGO-MINI]  56.06,85.12 0 bottom
LOGO20  QWIIC_LOGO_4MM  [QWIIC_4MM]  58.04,77.09 0 top
LOGO21  SFE_LOGO_NAME_FLAME.1_INCH  [SFE_LOGO_NAME_FLAME_.1]  60.6,90.09 0 bottom
LOGO22  OSHW-LOGOMINI  [OSHW-LOGO-MINI]  79.43,85.12 0 bottom
LOGO23  QWIIC_LOGO_4MM  [QWIIC_4MM]  81.41,77.09 0 top
LOGO24  SFE_LOGO_NAME_FLAME.1_INCH  [SFE_LOGO_NAME_FLAME_.1]  83.97,90.09 0 bottom
LOGO25  OSHW-LOGOMINI  [OSHW-LOGO-MINI]  9.32,147.85 0 bottom
LOGO26  QWIIC_LOGO_4MM  [QWIIC_4MM]  11.3,139.83 0 top
LOGO27  SFE_LOGO_NAME_FLAME.1_INCH  [SFE_LOGO_NAME_FLAME_.1]  13.87,152.83 0 bottom
LOGO28  OSHW-LOGOMINI  [OSHW-LOGO-MINI]  32.69,147.85 0 bottom
LOGO29  QWIIC_LOGO_4MM  [QWIIC_4MM]  34.67,139.83 0 top
LOGO30  SFE_LOGO_NAME_FLAME.1_INCH  [SFE_LOGO_NAME_FLAME_.1]  37.24,152.83 0 bottom
LOGO31  OSHW-LOGOMINI  [OSHW-LOGO-MINI]  56.06,147.85 0 bottom
LOGO32  QWIIC_LOGO_4MM  [QWIIC_4MM]  58.04,139.83 0 top
LOGO33  SFE_LOGO_NAME_FLAME.1_INCH  [SFE_LOGO_NAME_FLAME_.1]  60.6,152.83 0 bottom
LOGO34  OSHW-LOGOMINI  [OSHW-LOGO-MINI]  79.43,147.85 0 bottom
LOGO35  QWIIC_LOGO_4MM  [QWIIC_4MM]  81.41,139.83 0 top
LOGO36  SFE_LOGO_NAME_FLAME.1_INCH  [SFE_LOGO_NAME_FLAME_.1]  83.97,152.83 0 bottom
Q1  MBT3904DW1T1  [SC70-6]  49.28,19.05 90 top
Q2  MBT3904DW1T1  [SC70-6]  25.91,19.05 90 top
Q3  20V/4.2A/52mΩ/1.4W  [SOT23-3]  18.29,28.45 90 top
Q4  20V/4.2A/52mΩ/1.4W  [SOT23-3]  41.66,28.45 90 top
Q5  MBT3904DW1T1  [SC70-6]  72.64,19.05 90 top
Q6  20V/4.2A/52mΩ/1.4W  [SOT23-3]  65.02,28.45 90 top
Q7  MBT3904DW1T1  [SC70-6]  96.01,19.05 90 top
Q8  20V/4.2A/52mΩ/1.4W  [SOT23-3]  88.39,28.45 90 top
Q9  MBT3904DW1T1  [SC70-6]  25.91,81.79 90 top
Q10  20V/4.2A/52mΩ/1.4W  [SOT23-3]  18.29,91.19 90 top
Q11  MBT3904DW1T1  [SC70-6]  49.28,81.79 90 top
Q12  20V/4.2A/52mΩ/1.4W  [SOT23-3]  41.66,91.19 90 top
Q13  MBT3904DW1T1  [SC70-6]  72.64,81.79 90 top
Q14  20V/4.2A/52mΩ/1.4W  [SOT23-3]  65.02,91.19 90 top
Q15  MBT3904DW1T1  [SC70-6]  96.01,81.79 90 top
Q16  20V/4.2A/52mΩ/1.4W  [SOT23-3]  88.39,91.19 90 top
Q17  MBT3904DW1T1  [SC70-6]  25.91,144.53 90 top
Q18  20V/4.2A/52mΩ/1.4W  [SOT23-3]  18.29,153.92 90 top
Q19  MBT3904DW1T1  [SC70-6]  49.28,144.53 90 top
Q20  20V/4.2A/52mΩ/1.4W  [SOT23-3]  41.66,153.92 90 top
Q21  MBT3904DW1T1  [SC70-6]  72.64,144.53 90 top
Q22  20V/4.2A/52mΩ/1.4W  [SOT23-3]  65.02,153.92 90 top
Q23  MBT3904DW1T1  [SC70-6]  96.01,144.53 90 top
Q24  20V/4.2A/52mΩ/1.4W  [SOT23-3]  88.39,153.92 90 top
R1  10k  [0402-TIGHT]  41.66,24.61 180 top
R2  10k  [0402-TIGHT]  25.15,24.64 90 top
R3  1k  [0402-TIGHT]  16,38.61 0 top
R4  1k  [0402-TIGHT]  15.75,40.51 0 top
R5  1k  [0402-TIGHT]  39.37,38.61 0 top
R6  2.0k  [0603]  13.21,36.07 180 top
R7  10k  [0402-TIGHT]  18.29,24.61 180 top
R8  10k  [0402-TIGHT]  20.83,32.26 180 top
R9  5.1k  [0402-TIGHT]  23.37,12.57 90 top
R10  5.1k  [0402-TIGHT]  13.21,12.57 90 top
R11  2.0k  [0603]  36.58,36.07 180 top
R12  10k  [0402-TIGHT]  49.28,17.14 180 top
R13  10k  [0402-TIGHT]  48.87,20.78 0 top
R14  10k  [0402-TIGHT]  48.51,24.64 90 top
R15  1k  [0402-TIGHT]  39.12,40.51 0 top
R16  10k  [0402-TIGHT]  44.2,32.26 180 top
R17  10k  [0402-TIGHT]  25.91,17.14 180 top
R18  10k  [0402-TIGHT]  25.5,20.78 0 top
R19  5.1k  [0402-TIGHT]  46.74,12.57 90 top
R20  5.1k  [0402-TIGHT]  36.58,12.57 90 top
R21  1k  [0402-TIGHT]  39.4,36.6 0 top
R22  10k  [0402-TIGHT]  65.02,24.61 180 top
R23  1k  [0402-TIGHT]  62.74,38.61 0 top
R24  2.0k  [0603]  59.94,36.07 180 top
R25  10k  [0402-TIGHT]  72.64,17.14 180 top
R26  10k  [0402-TIGHT]  72.24,20.78 0 top
R27  10k  [0402-TIGHT]  71.88,24.64 90 top
R28  1k  [0402-TIGHT]  62.48,40.51 0 top
R29  10k  [0402-TIGHT]  67.56,32.26 180 top
R30  5.1k  [0402-TIGHT]  70.1,12.57 90 top
R31  5.1k  [0402-TIGHT]  59.94,12.57 90 top
R32  1k  [0402-TIGHT]  62.76,36.6 0 top
R33  10k  [0402-TIGHT]  88.39,24.61 180 top
R34  1k  [0402-TIGHT]  16.03,36.6 0 top
R35  1k  [0402-TIGHT]  86.11,38.61 0 top
R36  2.0k  [0603]  83.31,36.07 180 top
R37  10k  [0402-TIGHT]  96.01,17.14 180 top
R38  10k  [0402-TIGHT]  95.61,20.78 0 top
R39  10k  [0402-TIGHT]  95.25,24.64 90 top
R40  1k  [0402-TIGHT]  85.85,40.51 0 top
R41  10k  [0402-TIGHT]  90.93,32.26 180 top
R42  5.1k  [0402-TIGHT]  93.47,12.57 90 top
R43  5.1k  [0402-TIGHT]  83.31,12.57 90 top
R44  1k  [0402-TIGHT]  86.13,36.6 0 top
R45  10k  [0402-TIGHT]  18.29,87.35 180 top
R46  1k  [0402-TIGHT]  16,101.35 0 top
R47  2.0k  [0603]  13.21,98.81 180 top
R48  10k  [0402-TIGHT]  25.91,79.88 180 top
R49  10k  [0402-TIGHT]  25.5,83.52 0 top
R50  10k  [0402-TIGHT]  25.15,87.38 90 top
R51  1k  [0402-TIGHT]  15.75,103.25 0 top
R52  10k  [0402-TIGHT]  20.83,95 180 top
R53  5.1k  [0402-TIGHT]  23.37,75.31 90 top
R54  5.1k  [0402-TIGHT]  13.21,75.31 90 top
R55  1k  [0402-TIGHT]  16.03,99.34 0 top
R56  10k  [0402-TIGHT]  41.66,87.35 180 top
R57  1k  [0402-TIGHT]  39.37,101.35 0 top
R58  2.0k  [0603]  36.58,98.81 180 top
R59  10k  [0402-TIGHT]  49.28,79.88 180 top
R60  10k  [0402-TIGHT]  48.87,83.52 0 top
R61  10k  [0402-TIGHT]  48.51,87.38 90 top
R62  1k  [0402-TIGHT]  39.12,103.25 0 top
R63  10k  [0402-TIGHT]  44.2,95 180 top
R64  5.1k  [0402-TIGHT]  46.74,75.31 90 top
R65  5.1k  [0402-TIGHT]  36.58,75.31 90 top
R66  1k  [0402-TIGHT]  39.4,99.34 0 top
R67  10k  [0402-TIGHT]  65.02,87.35 180 top
R68  1k  [0402-TIGHT]  62.74,101.35 0 top
R69  2.0k  [0603]  59.94,98.81 180 top
R70  10k  [0402-TIGHT]  72.64,79.88 180 top
R71  10k  [0402-TIGHT]  72.24,83.52 0 top
R72  10k  [0402-TIGHT]  71.88,87.38 90 top
R73  1k  [0402-TIGHT]  62.48,103.25 0 top
R74  10k  [0402-TIGHT]  67.56,95 180 top
R75  5.1k  [0402-TIGHT]  70.1,75.31 90 top
R76  5.1k  [0402-TIGHT]  59.94,75.31 90 top
R77  1k  [0402-TIGHT]  62.76,99.34 0 top
R78  10k  [0402-TIGHT]  88.39,87.35 180 top
R79  1k  [0402-TIGHT]  86.11,101.35 0 top
R80  2.0k  [0603]  83.31,98.81 180 top
R81  10k  [0402-TIGHT]  96.01,79.88 180 top
R82  10k  [0402-TIGHT]  95.61,83.52 0 top
R83  10k  [0402-TIGHT]  95.25,87.38 90 top
R84  1k  [0402-TIGHT]  85.85,103.25 0 top
R85  10k  [0402-TIGHT]  90.93,95 180 top
R86  5.1k  [0402-TIGHT]  93.47,75.31 90 top
R87  5.1k  [0402-TIGHT]  83.31,75.31 90 top
R88  1k  [0402-TIGHT]  86.13,99.34 0 top
R89  10k  [0402-TIGHT]  18.29,150.09 180 top
R90  1k  [0402-TIGHT]  16,164.08 0 top
R91  2.0k  [0603]  13.21,161.54 180 top
R92  10k  [0402-TIGHT]  25.91,142.62 180 top
R93  10k  [0402-TIGHT]  25.5,146.25 0 top
R94  10k  [0402-TIGHT]  25.15,150.11 90 top
R95  1k  [0402-TIGHT]  15.75,165.99 0 top
R96  10k  [0402-TIGHT]  20.83,157.73 180 top
R97  5.1k  [0402-TIGHT]  23.37,138.05 90 top
R98  5.1k  [0402-TIGHT]  13.21,138.05 90 top
R99  1k  [0402-TIGHT]  16.03,162.08 0 top
R100  10k  [0402-TIGHT]  41.66,150.09 180 top
R101  1k  [0402-TIGHT]  39.37,164.08 0 top
R102  2.0k  [0603]  36.58,161.54 180 top
R103  10k  [0402-TIGHT]  49.28,142.62 180 top
R104  10k  [0402-TIGHT]  48.87,146.25 0 top
R105  10k  [0402-TIGHT]  48.51,150.11 90 top
R106  1k  [0402-TIGHT]  39.12,165.99 0 top
R107  10k  [0402-TIGHT]  44.2,157.73 180 top
R108  5.1k  [0402-TIGHT]  46.74,138.05 90 top
R109  5.1k  [0402-TIGHT]  36.58,138.05 90 top
R110  1k  [0402-TIGHT]  39.4,162.08 0 top
R111  10k  [0402-TIGHT]  65.02,150.09 180 top
R112  1k  [0402-TIGHT]  62.74,164.08 0 top
R113  2.0k  [0603]  59.94,161.54 180 top
R114  10k  [0402-TIGHT]  72.64,142.62 180 top
R115  10k  [0402-TIGHT]  72.24,146.25 0 top
R116  10k  [0402-TIGHT]  71.88,150.11 90 top
R117  1k  [0402-TIGHT]  62.48,165.99 0 top
R118  10k  [0402-TIGHT]  67.56,157.73 180 top
R119  5.1k  [0402-TIGHT]  70.1,138.05 90 top
R120  5.1k  [0402-TIGHT]  59.94,138.05 90 top
R121  1k  [0402-TIGHT]  62.76,162.08 0 top
R122  10k  [0402-TIGHT]  88.39,150.09 180 top
R123  1k  [0402-TIGHT]  86.11,164.08 0 top
R124  2.0k  [0603]  83.31,161.54 180 top
R125  10k  [0402-TIGHT]  96.01,142.62 180 top
R126  10k  [0402-TIGHT]  95.61,146.25 0 top
R127  10k  [0402-TIGHT]  95.25,150.11 90 top
R128  1k  [0402-TIGHT]  85.85,165.99 0 top
R129  10k  [0402-TIGHT]  90.93,157.73 180 top
R130  5.1k  [0402-TIGHT]  93.47,138.05 90 top
R131  5.1k  [0402-TIGHT]  83.31,138.05 90 top
R132  1k  [0402-TIGHT]  86.13,162.08 0 top
S1  Boot  [TACTILE_SWITCH_SMD_4.6X2.8MM]  46.74,30.1 180 top
S2  Reset  [TACTILE_SWITCH_SMD_4.6X2.8MM]  46.74,34.54 180 top
S3  Boot  [TACTILE_SWITCH_SMD_4.6X2.8MM]  23.37,30.1 180 top
S4  Reset  [TACTILE_SWITCH_SMD_4.6X2.8MM]  23.37,34.54 180 top
S5  Boot  [TACTILE_SWITCH_SMD_4.6X2.8MM]  70.1,30.1 180 top
S6  Reset  [TACTILE_SWITCH_SMD_4.6X2.8MM]  70.1,34.54 180 top
S7  Boot  [TACTILE_SWITCH_SMD_4.6X2.8MM]  93.47,30.1 180 top
S8  Reset  [TACTILE_SWITCH_SMD_4.6X2.8MM]  93.47,34.54 180 top
S9  Boot  [TACTILE_SWITCH_SMD_4.6X2.8MM]  23.37,92.84 180 top
S10  Reset  [TACTILE_SWITCH_SMD_4.6X2.8MM]  23.37,97.28 180 top
S11  Boot  [TACTILE_SWITCH_SMD_4.6X2.8MM]  46.74,92.84 180 top
S12  Reset  [TACTILE_SWITCH_SMD_4.6X2.8MM]  46.74,97.28 180 top
S13  Boot  [TACTILE_SWITCH_SMD_4.6X2.8MM]  70.1,92.84 180 top
S14  Reset  [TACTILE_SWITCH_SMD_4.6X2.8MM]  70.1,97.28 180 top
S15  Boot  [TACTILE_SWITCH_SMD_4.6X2.8MM]  93.47,92.84 180 top
S16  Reset  [TACTILE_SWITCH_SMD_4.6X2.8MM]  93.47,97.28 180 top
S17  Boot  [TACTILE_SWITCH_SMD_4.6X2.8MM]  23.37,155.57 180 top
S18  Reset  [TACTILE_SWITCH_SMD_4.6X2.8MM]  23.37,160.02 180 top
S19  Boot  [TACTILE_SWITCH_SMD_4.6X2.8MM]  46.74,155.57 180 top
S20  Reset  [TACTILE_SWITCH_SMD_4.6X2.8MM]  46.74,160.02 180 top
S21  Boot  [TACTILE_SWITCH_SMD_4.6X2.8MM]  70.1,155.57 180 top
S22  Reset  [TACTILE_SWITCH_SMD_4.6X2.8MM]  70.1,160.02 180 top
S23  Boot  [TACTILE_SWITCH_SMD_4.6X2.8MM]  93.47,155.57 180 top
S24  Reset  [TACTILE_SWITCH_SMD_4.6X2.8MM]  93.47,160.02 180 top
TP1  TEST-POINT3X5  [PAD.03X.05]  27.18,19.56 0 bottom
TP2  TEST-POINT3X5  [PAD.03X.05]  28.7,65.66 0 bottom
TP3  TEST-POINT3X5  [PAD.03X.05]  20.07,61.09 0 bottom
TP4  TEST-POINT3X5  [PAD.03X.05]  15.88,49.4 0 bottom
TP5  TEST-POINT3X5  [PAD.03X.05]  50.55,19.56 0 bottom
TP6  TEST-POINT3X5  [PAD.03X.05]  52.07,65.66 0 bottom
TP7  TEST-POINT3X5  [PAD.03X.05]  43.43,61.09 0 bottom
TP8  TEST-POINT3X5  [PAD.03X.05]  39.24,49.4 0 bottom
TP9  TEST-POINT3X5  [PAD.03X.05]  73.91,19.56 0 bottom
TP10  TEST-POINT3X5  [PAD.03X.05]  75.44,65.66 0 bottom
TP11  TEST-POINT3X5  [PAD.03X.05]  66.8,61.09 0 bottom
TP12  TEST-POINT3X5  [PAD.03X.05]  62.61,49.4 0 bottom
TP13  TEST-POINT3X5  [PAD.03X.05]  97.28,19.56 0 bottom
TP14  TEST-POINT3X5  [PAD.03X.05]  98.81,65.66 0 bottom
TP15  TEST-POINT3X5  [PAD.03X.05]  90.17,61.09 0 bottom
TP16  TEST-POINT3X5  [PAD.03X.05]  85.98,49.4 0 bottom
TP17  TEST-POINT3X5  [PAD.03X.05]  27.18,82.3 0 bottom
TP18  TEST-POINT3X5  [PAD.03X.05]  28.7,128.4 0 bottom
TP19  TEST-POINT3X5  [PAD.03X.05]  20.07,123.83 0 bottom
TP20  TEST-POINT3X5  [PAD.03X.05]  15.88,112.14 0 bottom
TP21  TEST-POINT3X5  [PAD.03X.05]  50.55,82.3 0 bottom
TP22  TEST-POINT3X5  [PAD.03X.05]  52.07,128.4 0 bottom
TP23  TEST-POINT3X5  [PAD.03X.05]  43.43,123.83 0 bottom
TP24  TEST-POINT3X5  [PAD.03X.05]  39.24,112.14 0 bottom
TP25  TEST-POINT3X5  [PAD.03X.05]  73.91,82.3 0 bottom
TP26  TEST-POINT3X5  [PAD.03X.05]  75.44,128.4 0 bottom
TP27  TEST-POINT3X5  [PAD.03X.05]  66.8,123.83 0 bottom
TP28  TEST-POINT3X5  [PAD.03X.05]  62.61,112.14 0 bottom
TP29  TEST-POINT3X5  [PAD.03X.05]  97.28,82.3 0 bottom
TP30  TEST-POINT3X5  [PAD.03X.05]  98.81,128.4 0 bottom
TP31  TEST-POINT3X5  [PAD.03X.05]  90.17,123.83 0 bottom
TP32  TEST-POINT3X5  [PAD.03X.05]  85.98,112.14 0 bottom
TP33  TEST-POINT3X5  [PAD.03X.05]  27.18,145.03 0 bottom
TP34  TEST-POINT3X5  [PAD.03X.05]  28.7,191.13 0 bottom
TP35  TEST-POINT3X5  [PAD.03X.05]  20.07,186.56 0 bottom
TP36  TEST-POINT3X5  [PAD.03X.05]  15.88,174.88 0 bottom
TP37  TEST-POINT3X5  [PAD.03X.05]  50.55,145.03 0 bottom
TP38  TEST-POINT3X5  [PAD.03X.05]  52.07,191.13 0 bottom
TP39  TEST-POINT3X5  [PAD.03X.05]  43.43,186.56 0 bottom
TP40  TEST-POINT3X5  [PAD.03X.05]  39.24,174.88 0 bottom
TP41  TEST-POINT3X5  [PAD.03X.05]  73.91,145.03 0 bottom
TP42  TEST-POINT3X5  [PAD.03X.05]  75.44,191.13 0 bottom
TP43  TEST-POINT3X5  [PAD.03X.05]  66.8,186.56 0 bottom
TP44  TEST-POINT3X5  [PAD.03X.05]  62.61,174.88 0 bottom
TP45  TEST-POINT3X5  [PAD.03X.05]  97.28,145.03 0 bottom
TP46  TEST-POINT3X5  [PAD.03X.05]  98.81,191.13 0 bottom
TP47  TEST-POINT3X5  [PAD.03X.05]  90.17,186.56 0 bottom
TP48  TEST-POINT3X5  [PAD.03X.05]  85.98,174.88 0 bottom
U1  MCP73831  [SOT23-5]  13.21,33.53 0 top
U2  ESP-WROOM-3232D-NARROW  [ESP-WROOM-32D-NARROW]  18.29,53.85 90 top
U3  XC6222B331MR-G  [SOT23-5]  18.29,32.26 0 top
U4  MAX17048  [DFN-8]  13.21,38.61 0 top
U5  XC6222B331MR-G  [SOT23-5]  22.1,24.84 270 top
U6  MCP73831  [SOT23-5]  36.58,33.53 0 top
U7  CH340C  [SO016]  18.29,19.41 0 top
U8  CH340C  [SO016]  41.66,19.41 0 top
U9  MAX17048  [DFN-8]  36.58,38.61 0 top
U10  XC6222B331MR-G  [SOT23-5]  41.66,32.26 0 top
U11  XC6222B331MR-G  [SOT23-5]  45.47,24.84 270 top
U12  ESP-WROOM-3232D-NARROW  [ESP-WROOM-32D-NARROW]  41.66,53.85 90 top
U13  MCP73831  [SOT23-5]  59.94,33.53 0 top
U14  CH340C  [SO016]  65.02,19.41 0 top
U15  MAX17048  [DFN-8]  59.94,38.61 0 top
U16  XC6222B331MR-G  [SOT23-5]  65.02,32.26 0 top
U17  XC6222B331MR-G  [SOT23-5]  68.83,24.84 270 top
U18  ESP-WROOM-3232D-NARROW  [ESP-WROOM-32D-NARROW]  65.02,53.85 90 top
U19  MCP73831  [SOT23-5]  83.31,33.53 0 top
U20  CH340C  [SO016]  88.39,19.41 0 top
U21  MAX17048  [DFN-8]  83.31,38.61 0 top
U22  XC6222B331MR-G  [SOT23-5]  88.39,32.26 0 top
U23  XC6222B331MR-G  [SOT23-5]  92.2,24.84 270 top
U24  ESP-WROOM-3232D-NARROW  [ESP-WROOM-32D-NARROW]  88.39,53.85 90 top
U25  MCP73831  [SOT23-5]  13.21,96.27 0 top
U26  CH340C  [SO016]  18.29,82.14 0 top
U27  MAX17048  [DFN-8]  13.21,101.35 0 top
U28  XC6222B331MR-G  [SOT23-5]  18.29,95 0 top
U29  XC6222B331MR-G  [SOT23-5]  22.1,87.58 270 top
U30  ESP-WROOM-3232D-NARROW  [ESP-WROOM-32D-NARROW]  18.29,116.59 90 top
U31  MCP73831  [SOT23-5]  36.58,96.27 0 top
U32  CH340C  [SO016]  41.66,82.14 0 top
U33  MAX17048  [DFN-8]  36.58,101.35 0 top
U34  XC6222B331MR-G  [SOT23-5]  41.66,95 0 top
U35  XC6222B331MR-G  [SOT23-5]  45.47,87.58 270 top
U36  ESP-WROOM-3232D-NARROW  [ESP-WROOM-32D-NARROW]  41.66,116.59 90 top
U37  MCP73831  [SOT23-5]  59.94,96.27 0 top
U38  CH340C  [SO016]  65.02,82.14 0 top
U39  MAX17048  [DFN-8]  59.94,101.35 0 top
U40  XC6222B331MR-G  [SOT23-5]  65.02,95 0 top
U41  XC6222B331MR-G  [SOT23-5]  68.83,87.58 270 top
U42  ESP-WROOM-3232D-NARROW  [ESP-WROOM-32D-NARROW]  65.02,116.59 90 top
U43  MCP73831  [SOT23-5]  83.31,96.27 0 top
U44  CH340C  [SO016]  88.39,82.14 0 top
U45  MAX17048  [DFN-8]  83.31,101.35 0 top
U46  XC6222B331MR-G  [SOT23-5]  88.39,95 0 top
U47  XC6222B331MR-G  [SOT23-5]  92.2,87.58 270 top
U48  ESP-WROOM-3232D-NARROW  [ESP-WROOM-32D-NARROW]  88.39,116.59 90 top
U49  MCP73831  [SOT23-5]  13.21,159 0 top
U50  CH340C  [SO016]  18.29,144.88 0 top
U51  MAX17048  [DFN-8]  13.21,164.08 0 top
U52  XC6222B331MR-G  [SOT23-5]  18.29,157.73 0 top
U53  XC6222B331MR-G  [SOT23-5]  22.1,150.32 270 top
U54  ESP-WROOM-3232D-NARROW  [ESP-WROOM-32D-NARROW]  18.29,179.32 90 top
U55  MCP73831  [SOT23-5]  36.58,159 0 top
U56  CH340C  [SO016]  41.66,144.88 0 top
U57  MAX17048  [DFN-8]  36.58,164.08 0 top
U58  XC6222B331MR-G  [SOT23-5]  41.66,157.73 0 top
U59  XC6222B331MR-G  [SOT23-5]  45.47,150.32 270 top
U60  ESP-WROOM-3232D-NARROW  [ESP-WROOM-32D-NARROW]  41.66,179.32 90 top
U61  MCP73831  [SOT23-5]  59.94,159 0 top
U62  CH340C  [SO016]  65.02,144.88 0 top
U63  MAX17048  [DFN-8]  59.94,164.08 0 top
U64  XC6222B331MR-G  [SOT23-5]  65.02,157.73 0 top
U65  XC6222B331MR-G  [SOT23-5]  68.83,150.32 270 top
U66  ESP-WROOM-3232D-NARROW  [ESP-WROOM-32D-NARROW]  65.02,179.32 90 top
U67  MCP73831  [SOT23-5]  83.31,159 0 top
U68  CH340C  [SO016]  88.39,144.88 0 top
U69  MAX17048  [DFN-8]  83.31,164.08 0 top
U70  XC6222B331MR-G  [SOT23-5]  88.39,157.73 0 top
U71  XC6222B331MR-G  [SOT23-5]  92.2,150.32 270 top
U72  ESP-WROOM-3232D-NARROW  [ESP-WROOM-32D-NARROW]  88.39,179.32 90 top
U$1  [SFE_LOGO_FLAME_STOP_.1]  28.19,16.26 0 bottom
U$2  [#23#PICO#0]  27.94,51.31 0 bottom
U$3  [#19#POCI#0]  27.94,53.85 0 bottom
U$4  [#4#FREE#0]  27.94,61.47 0 bottom
U$5  [#CHG_LED#0]  17.09,47.02 270 bottom
U$6  [ESP32#WROOM0]  18.29,66.55 0 bottom
U$7  [THING_PLUS_C0]  18.29,64.01 0 bottom
U$8  [#SHLD#0]  11.68,16.33 90 bottom
U$9  [#_GND#0]  28.19,30.99 0 bottom
U$10  [#_NC#0]  28.19,28.45 0 bottom
U$11  [#_3V3#0]  28.19,25.91 0 bottom
U$12  [SFE_LOGO_FLAME_.1]  27.94,16.26 0 top
U$13  [CHG1]  46.46,38.61 0 top
U$14  [PWR2]  46.61,36.7 0 top
U$15  [STAT0]  47.07,40.49 0 top
U$16  [A03]  50.16,33.53 90 top
U$17  [A12]  50.16,36.07 90 top
U$18  [A21]  50.16,38.61 90 top
U$19  [A30]  50.16,41.15 90 top
U$20  [EN3]  33.66,36.07 0 top
U$21  [130]  33.4,41.15 0 top
U$22  [BOOT0]  46.86,27.94 0 top
U$23  [3V30]  26.8,25.91 90 top
U$24  [CHG1]  23.09,38.61 0 top
U$25  [PWR2]  23.24,36.7 0 top
U$26  [STAT0]  23.7,40.49 0 top
U$27  [#RST#0]  50.04,23.24 90 top
U$28  [RST0]  46.86,32.38 0 top
U$29  [VB1]  33.78,33.53 0 top
U$30  [VU0]  33.78,38.61 0 top
U$31  [3V30]  50.16,25.91 90 top
U$32  [#17#TX#0]  51.31,58.93 0 bottom
U$33  [#16#RX#0]  51.31,56.39 0 bottom
U$34  [#18#SCK#0]  51.31,48.77 0 bottom
U$35  [#35#A5#0]  51.31,46.23 0 bottom
U$36  [#36#A4#0]  51.31,43.69 0 bottom
U$37  [#25#A1#2]  51.31,36.07 0 bottom
U$38  [#26#A0#3]  51.31,33.53 0 bottom
U$39  [#34#A2#1]  51.31,38.61 0 bottom
U$40  [#39#A3#0]  51.31,41.15 0 bottom
U$41  [#12#4]  31.88,43.69 0 bottom
U$42  [#14#9]  31.88,56.39 0 bottom
U$43  [#15#7]  31.88,51.31 0 bottom
U$44  [#27#5]  31.88,46.23 0 bottom
U$45  [#32#8]  31.88,53.85 0 bottom
U$46  [#33#6]  31.88,48.77 0 bottom
U$47  [#EN#1]  31.88,36.07 0 bottom
U$48  [#VBAT#0]  31.88,33.53 0 bottom
U$49  [#VUSB#2]  31.88,38.61 0 bottom
U$50  [#13#LED#0]  31.88,41.15 0 bottom
U$51  [#21#SDA#1]  31.75,61.47 0 bottom
U$52  [#22#SCL#0]  31.75,58.93 0 bottom
U$53  [#PWR#0]  38.73,36.07 0 bottom
U$54  [#RST#0]  50.04,23.24 270 bottom
U$55  [GND1]  50.16,31.11 90 top
U$56  [NC0]  50.16,28.45 90 top
U$57  [SFE_LOGO_FLAME_STOP_.1]  51.56,16.26 0 bottom
U$58  [#23#PICO#0]  51.31,51.31 0 bottom
U$59  [#19#POCI#0]  51.31,53.85 0 bottom
U$60  [#4#FREE#0]  51.31,61.47 0 bottom
U$61  [#CHG_LED#0]  40.46,47.02 270 bottom
U$62  [ESP32#WROOM0]  41.66,66.55 0 bottom
U$63  [THING_PLUS_C0]  41.66,64.01 0 bottom
U$64  [#_GND#0]  51.56,30.99 0 bottom
U$65  [#_NC#0]  51.56,28.45 0 bottom
U$66  [#_3V3#0]  51.56,25.91 0 bottom
U$67  [SFE_LOGO_FLAME_.1]  51.31,16.26 0 top
U$68  [A03]  26.8,33.53 90 top
U$69  [A12]  26.8,36.07 90 top
U$70  [A21]  26.8,38.61 90 top
U$71  [A30]  26.8,41.15 90 top
U$72  [#17#TX#0]  27.94,58.93 0 bottom
U$73  [VB1]  10.41,33.53 0 top
U$74  [EN3]  10.29,36.07 0 top
U$75  [GND1]  26.8,31.11 90 top
U$76  [VU0]  10.41,38.61 0 top
U$77  [130]  10.03,41.15 0 top
U$78  [BOOT0]  23.5,27.94 0 top
U$79  [#RST#0]  26.67,23.24 90 top
U$80  [RST0]  23.5,32.38 0 top
U$81  [#16#RX#0]  27.94,56.39 0 bottom
U$82  [#SHLD#0]  35.05,16.33 90 bottom
U$83  [#18#SCK#0]  27.94,48.77 0 bottom
U$84  [#35#A5#0]  27.94,46.23 0 bottom
U$85  [#36#A4#0]  27.94,43.69 0 bottom
U$86  [#25#A1#2]  27.94,36.07 0 bottom
U$87  [#26#A0#3]  27.94,33.53 0 bottom
U$88  [#34#A2#1]  27.94,38.61 0 bottom
U$89  [#39#A3#0]  27.94,41.15 0 bottom
U$90  [#12#4]  8.51,43.69 0 bottom
U$91  [#14#9]  8.51,56.39 0 bottom
U$92  [#15#7]  8.51,51.31 0 bottom
U$93  [#27#5]  8.51,46.23 0 bottom
U$94  [#32#8]  8.51,53.85 0 bottom
U$95  [#33#6]  8.51,48.77 0 bottom
U$96  [#EN#1]  8.51,36.07 0 bottom
U$97  [#VBAT#0]  8.51,33.53 0 bottom
U$98  [#VUSB#2]  8.51,38.61 0 bottom
U$99  [#13#LED#0]  8.51,41.15 0 bottom
U$100  [#21#SDA#1]  8.38,61.47 0 bottom
U$101  [#22#SCL#0]  8.38,58.93 0 bottom
U$102  [#PWR#0]  15.37,36.07 0 bottom
U$103  [CHG1]  69.82,38.61 0 top
U$104  [PWR2]  69.98,36.7 0 top
U$105  [STAT0]  70.43,40.49 0 top
U$106  [A03]  73.53,33.53 90 top
U$107  [NC0]  26.8,28.45 90 top
U$108  [A12]  73.53,36.07 90 top
U$109  [#RST#0]  26.67,23.24 270 bottom
U$110  [A21]  73.53,38.61 90 top
U$111  [A30]  73.53,41.15 90 top
U$112  [EN3]  57.02,36.07 0 top
U$113  [130]  56.77,41.15 0 top
U$114  [BOOT0]  70.23,27.94 0 top
U$115  [#RST#0]  73.41,23.24 90 top
U$116  [RST0]  70.23,32.38 0 top
U$117  [VB1]  57.15,33.53 0 top
U$118  [VU0]  57.15,38.61 0 top
U$119  [3V30]  73.53,25.91 90 top
U$120  [#17#TX#0]  74.68,58.93 0 bottom
U$121  [#16#RX#0]  74.68,56.39 0 bottom
U$122  [#18#SCK#0]  74.68,48.77 0 bottom
U$123  [#35#A5#0]  74.68,46.23 0 bottom
U$124  [#36#A4#0]  74.68,43.69 0 bottom
U$125  [#25#A1#2]  74.68,36.07 0 bottom
U$126  [#26#A0#3]  74.68,33.53 0 bottom
U$127  [#34#A2#1]  74.68,38.61 0 bottom
U$128  [#39#A3#0]  74.68,41.15 0 bottom
U$129  [#12#4]  55.24,43.69 0 bottom
U$130  [#14#9]  55.24,56.39 0 bottom
U$131  [#15#7]  55.24,51.31 0 bottom
U$132  [#27#5]  55.24,46.23 0 bottom
U$133  [#32#8]  55.24,53.85 0 bottom
U$134  [#33#6]  55.24,48.77 0 bottom
U$135  [#EN#1]  55.24,36.07 0 bottom
U$136  [#VBAT#0]  55.24,33.53 0 bottom
U$137  [#VUSB#2]  55.24,38.61 0 bottom
U$138  [#13#LED#0]  55.24,41.15 0 bottom
U$139  [#21#SDA#1]  55.12,61.47 0 bottom
U$140  [#22#SCL#0]  55.12,58.93 0 bottom
U$141  [#PWR#0]  62.1,36.07 0 bottom
U$142  [#RST#0]  73.41,23.24 270 bottom
U$143  [GND1]  73.53,31.11 90 top
U$144  [NC0]  73.53,28.45 90 top
U$145  [SFE_LOGO_FLAME_STOP_.1]  74.93,16.26 0 bottom
U$146  [#23#PICO#0]  74.68,51.31 0 bottom
U$147  [#19#POCI#0]  74.68,53.85 0 bottom
U$148  [#4#FREE#0]  74.68,61.47 0 bottom
U$149  [#CHG_LED#0]  63.83,47.02 270 bottom
U$150  [ESP32#WROOM0]  65.02,66.55 0 bottom
U$151  [THING_PLUS_C0]  65.02,64.01 0 bottom
U$152  [#_GND#0]  74.93,30.99 0 bottom
U$153  [#_NC#0]  74.93,28.45 0 bottom
U$154  [#_3V3#0]  74.93,25.91 0 bottom
U$155  [SFE_LOGO_FLAME_.1]  74.68,16.26 0 top
U$156  [#SHLD#0]  58.42,16.33 90 bottom
U$157  [CHG1]  93.19,38.61 0 top
U$158  [PWR2]  93.34,36.7 0 top
U$159  [STAT0]  93.8,40.49 0 top
U$160  [A03]  96.9,33.53 90 top
U$161  [A12]  96.9,36.07 90 top
U$162  [A21]  96.9,38.61 90 top
U$163  [A30]  96.9,41.15 90 top
U$164  [EN3]  80.39,36.07 0 top
U$165  [130]  80.14,41.15 0 top
U$166  [BOOT0]  93.6,27.94 0 top
U$167  [#RST#0]  96.77,23.24 90 top
U$168  [RST0]  93.6,32.38 0 top
U$169  [VB1]  80.52,33.53 0 top
U$170  [VU0]  80.52,38.61 0 top
U$171  [3V30]  96.9,25.91 90 top
U$172  [#17#TX#0]  98.04,58.93 0 bottom
U$173  [#16#RX#0]  98.04,56.39 0 bottom
U$174  [#18#SCK#0]  98.04,48.77 0 bottom
U$175  [#35#A5#0]  98.04,46.23 0 bottom
U$176  [#36#A4#0]  98.04,43.69 0 bottom
U$177  [#25#A1#2]  98.04,36.07 0 bottom
U$178  [#26#A0#3]  98.04,33.53 0 bottom
U$179  [#34#A2#1]  98.04,38.61 0 bottom
U$180  [#39#A3#0]  98.04,41.15 0 bottom
U$181  [#12#4]  78.61,43.69 0 bottom
U$182  [#14#9]  78.61,56.39 0 bottom
U$183  [#15#7]  78.61,51.31 0 bottom
U$184  [#27#5]  78.61,46.23 0 bottom
U$185  [#32#8]  78.61,53.85 0 bottom
U$186  [#33#6]  78.61,48.77 0 bottom
U$187  [#EN#1]  78.61,36.07 0 bottom
U$188  [#VBAT#0]  78.61,33.53 0 bottom
U$189  [#VUSB#2]  78.61,38.61 0 bottom
U$190  [#13#LED#0]  78.61,41.15 0 bottom
U$191  [#21#SDA#1]  78.49,61.47 0 bottom
U$192  [#22#SCL#0]  78.49,58.93 0 bottom
U$193  [#PWR#0]  85.47,36.07 0 bottom
U$194  [#RST#0]  96.77,23.24 270 bottom
U$195  [GND1]  96.9,31.11 90 top
U$196  [NC0]  96.9,28.45 90 top
U$197  [SFE_LOGO_FLAME_STOP_.1]  98.3,16.26 0 bottom
U$198  [#23#PICO#0]  98.04,51.31 0 bottom
U$199  [#19#POCI#0]  98.04,53.85 0 bottom
U$200  [#4#FREE#0]  98.04,61.47 0 bottom
U$201  [#CHG_LED#0]  87.2,47.02 270 bottom
U$202  [ESP32#WROOM0]  88.39,66.55 0 bottom
U$203  [THING_PLUS_C0]  88.39,64.01 0 bottom
U$204  [#_GND#0]  98.3,30.99 0 bottom
U$205  [#_NC#0]  98.3,28.45 0 bottom
U$206  [#_3V3#0]  98.3,25.91 0 bottom
U$207  [SFE_LOGO_FLAME_.1]  98.04,16.26 0 top
U$208  [#SHLD#0]  81.79,16.33 90 bottom
U$209  [CHG1]  23.09,101.35 0 top
U$210  [PWR2]  23.24,99.44 0 top
U$211  [STAT0]  23.7,103.23 0 top
U$212  [A03]  26.8,96.27 90 top
U$213  [A12]  26.8,98.81 90 top
U$214  [A21]  26.8,101.35 90 top
U$215  [A30]  26.8,103.89 90 top
U$216  [EN3]  10.29,98.81 0 top
U$217  [130]  10.03,103.89 0 top
U$218  [BOOT0]  23.5,90.68 0 top
U$219  [#RST#0]  26.67,85.98 90 top
U$220  [RST0]  23.5,95.12 0 top
U$221  [VB1]  10.41,96.27 0 top
U$222  [VU0]  10.41,101.35 0 top
U$223  [3V30]  26.8,88.65 90 top
U$224  [#17#TX#0]  27.94,121.67 0 bottom
U$225  [#16#RX#0]  27.94,119.13 0 bottom
U$226  [#18#SCK#0]  27.94,111.51 0 bottom
U$227  [#35#A5#0]  27.94,108.97 0 bottom
U$228  [#36#A4#0]  27.94,106.43 0 bottom
U$229  [#25#A1#2]  27.94,98.81 0 bottom
U$230  [#26#A0#3]  27.94,96.27 0 bottom
U$231  [#34#A2#1]  27.94,101.35 0 bottom
U$232  [#39#A3#0]  27.94,103.89 0 bottom
U$233  [#12#4]  8.51,106.43 0 bottom
U$234  [#14#9]  8.51,119.13 0 bottom
U$235  [#15#7]  8.51,114.05 0 bottom
U$236  [#27#5]  8.51,108.97 0 bottom
U$237  [#32#8]  8.51,116.59 0 bottom
U$238  [#33#6]  8.51,111.51 0 bottom
U$239  [#EN#1]  8.51,98.81 0 bottom
U$240  [#VBAT#0]  8.51,96.27 0 bottom
U$241  [#VUSB#2]  8.51,101.35 0 bottom
U$242  [#13#LED#0]  8.51,103.89 0 bottom
U$243  [#21#SDA#1]  8.38,124.21 0 bottom